# Altium PCB PCB_Main.PcbDoc
Units mil, origin at the board's own origin, x right, y up, seen from the top; angles counter-clockwise.
Board outline 2500 x 2500 mil, 4 copper layers (Top Layer, Layer 1, Layer 2, Bottom Layer), stack 62.449 mil thick; 116 components, 50 nets, 678 pads, 143 vias.
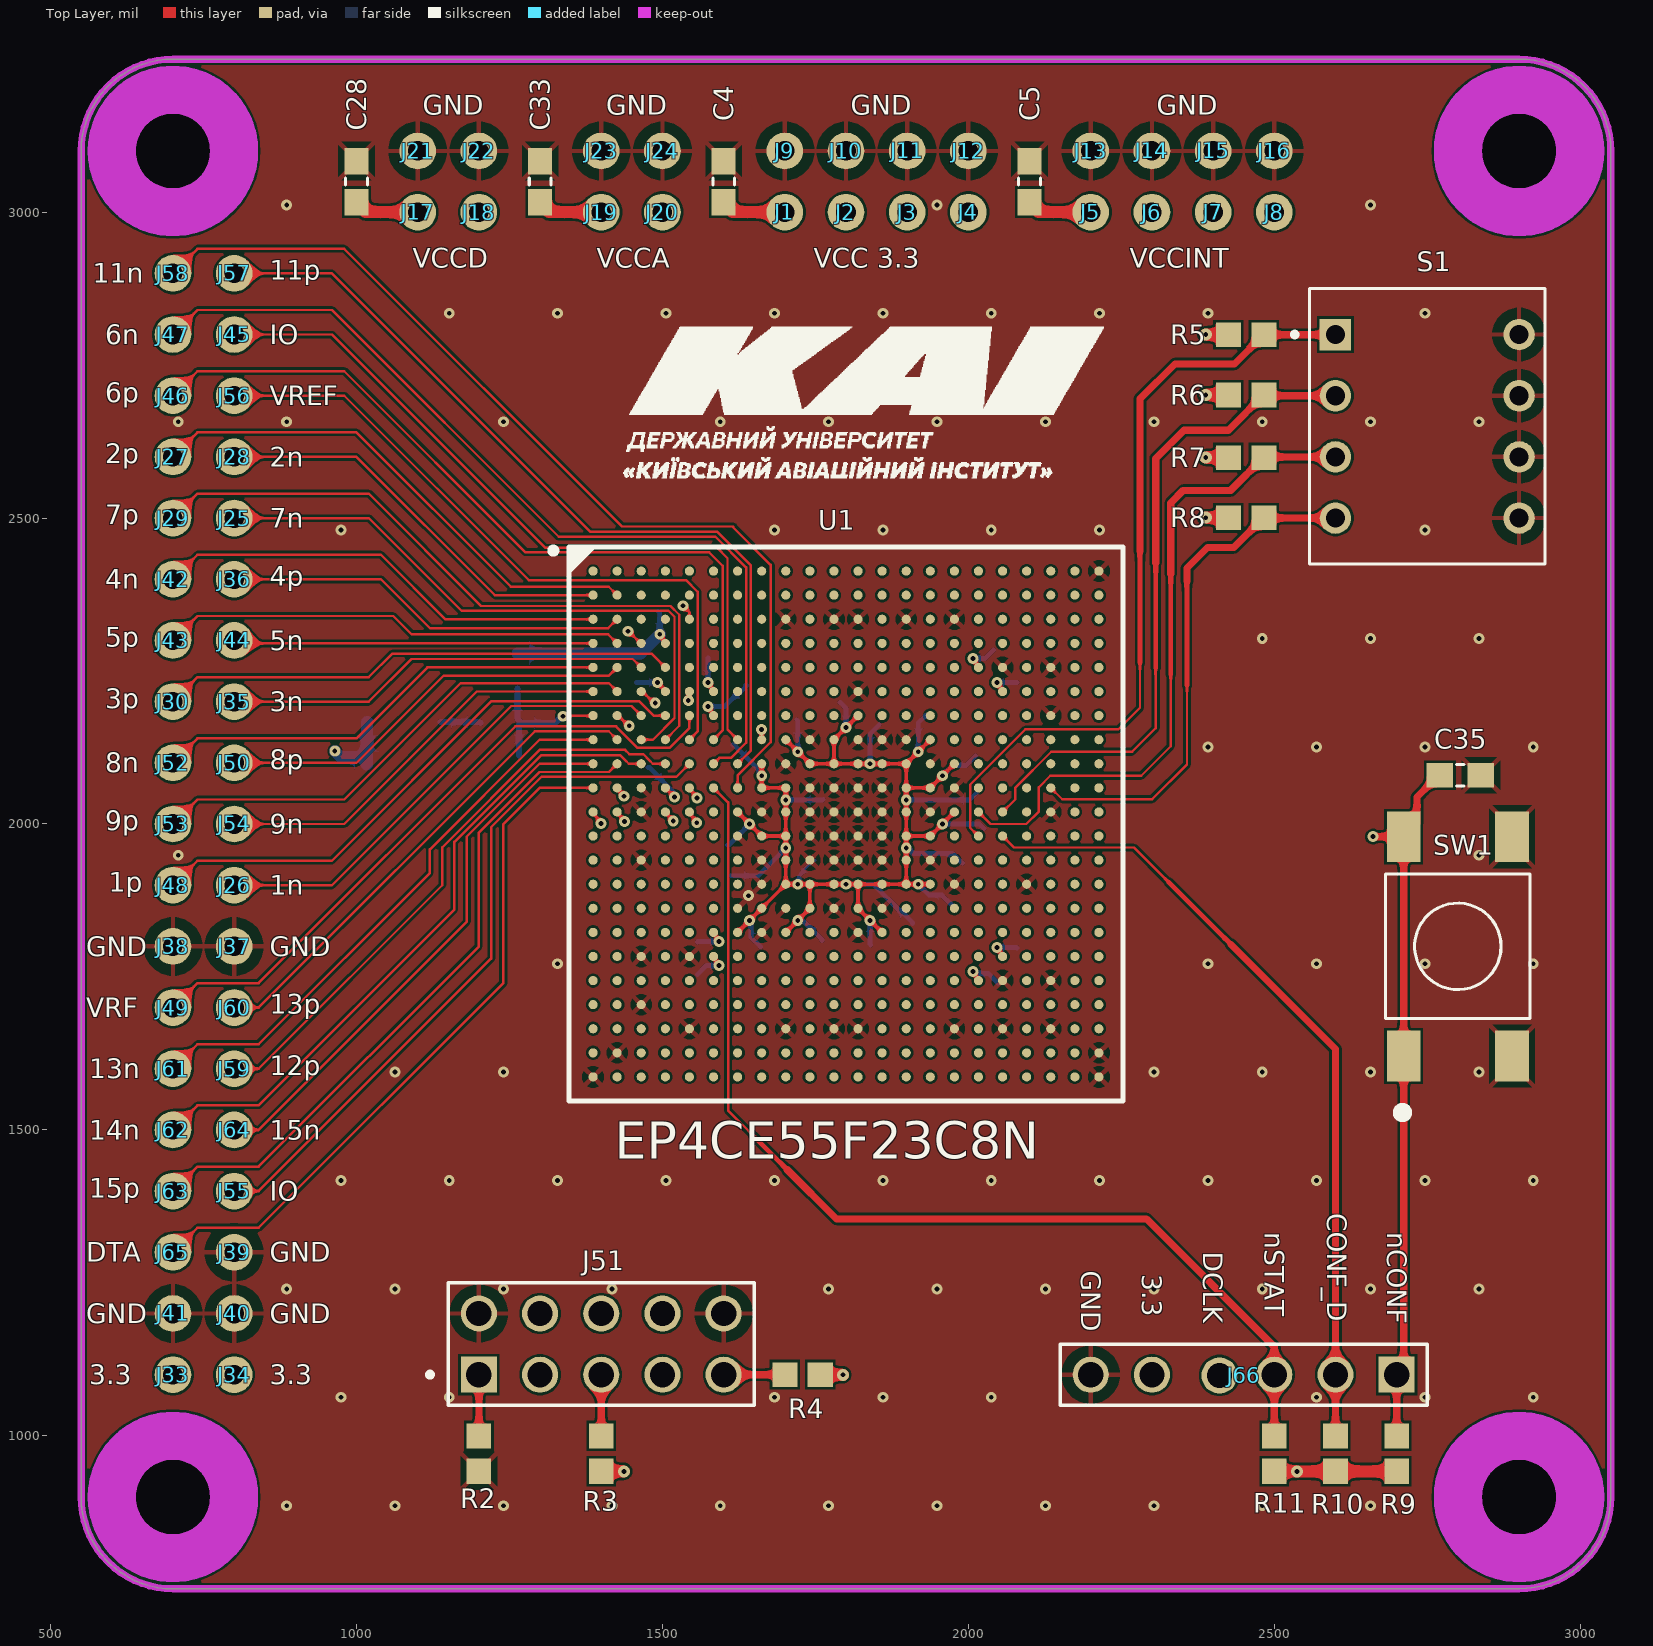
[diagram p0: Top Layer view]
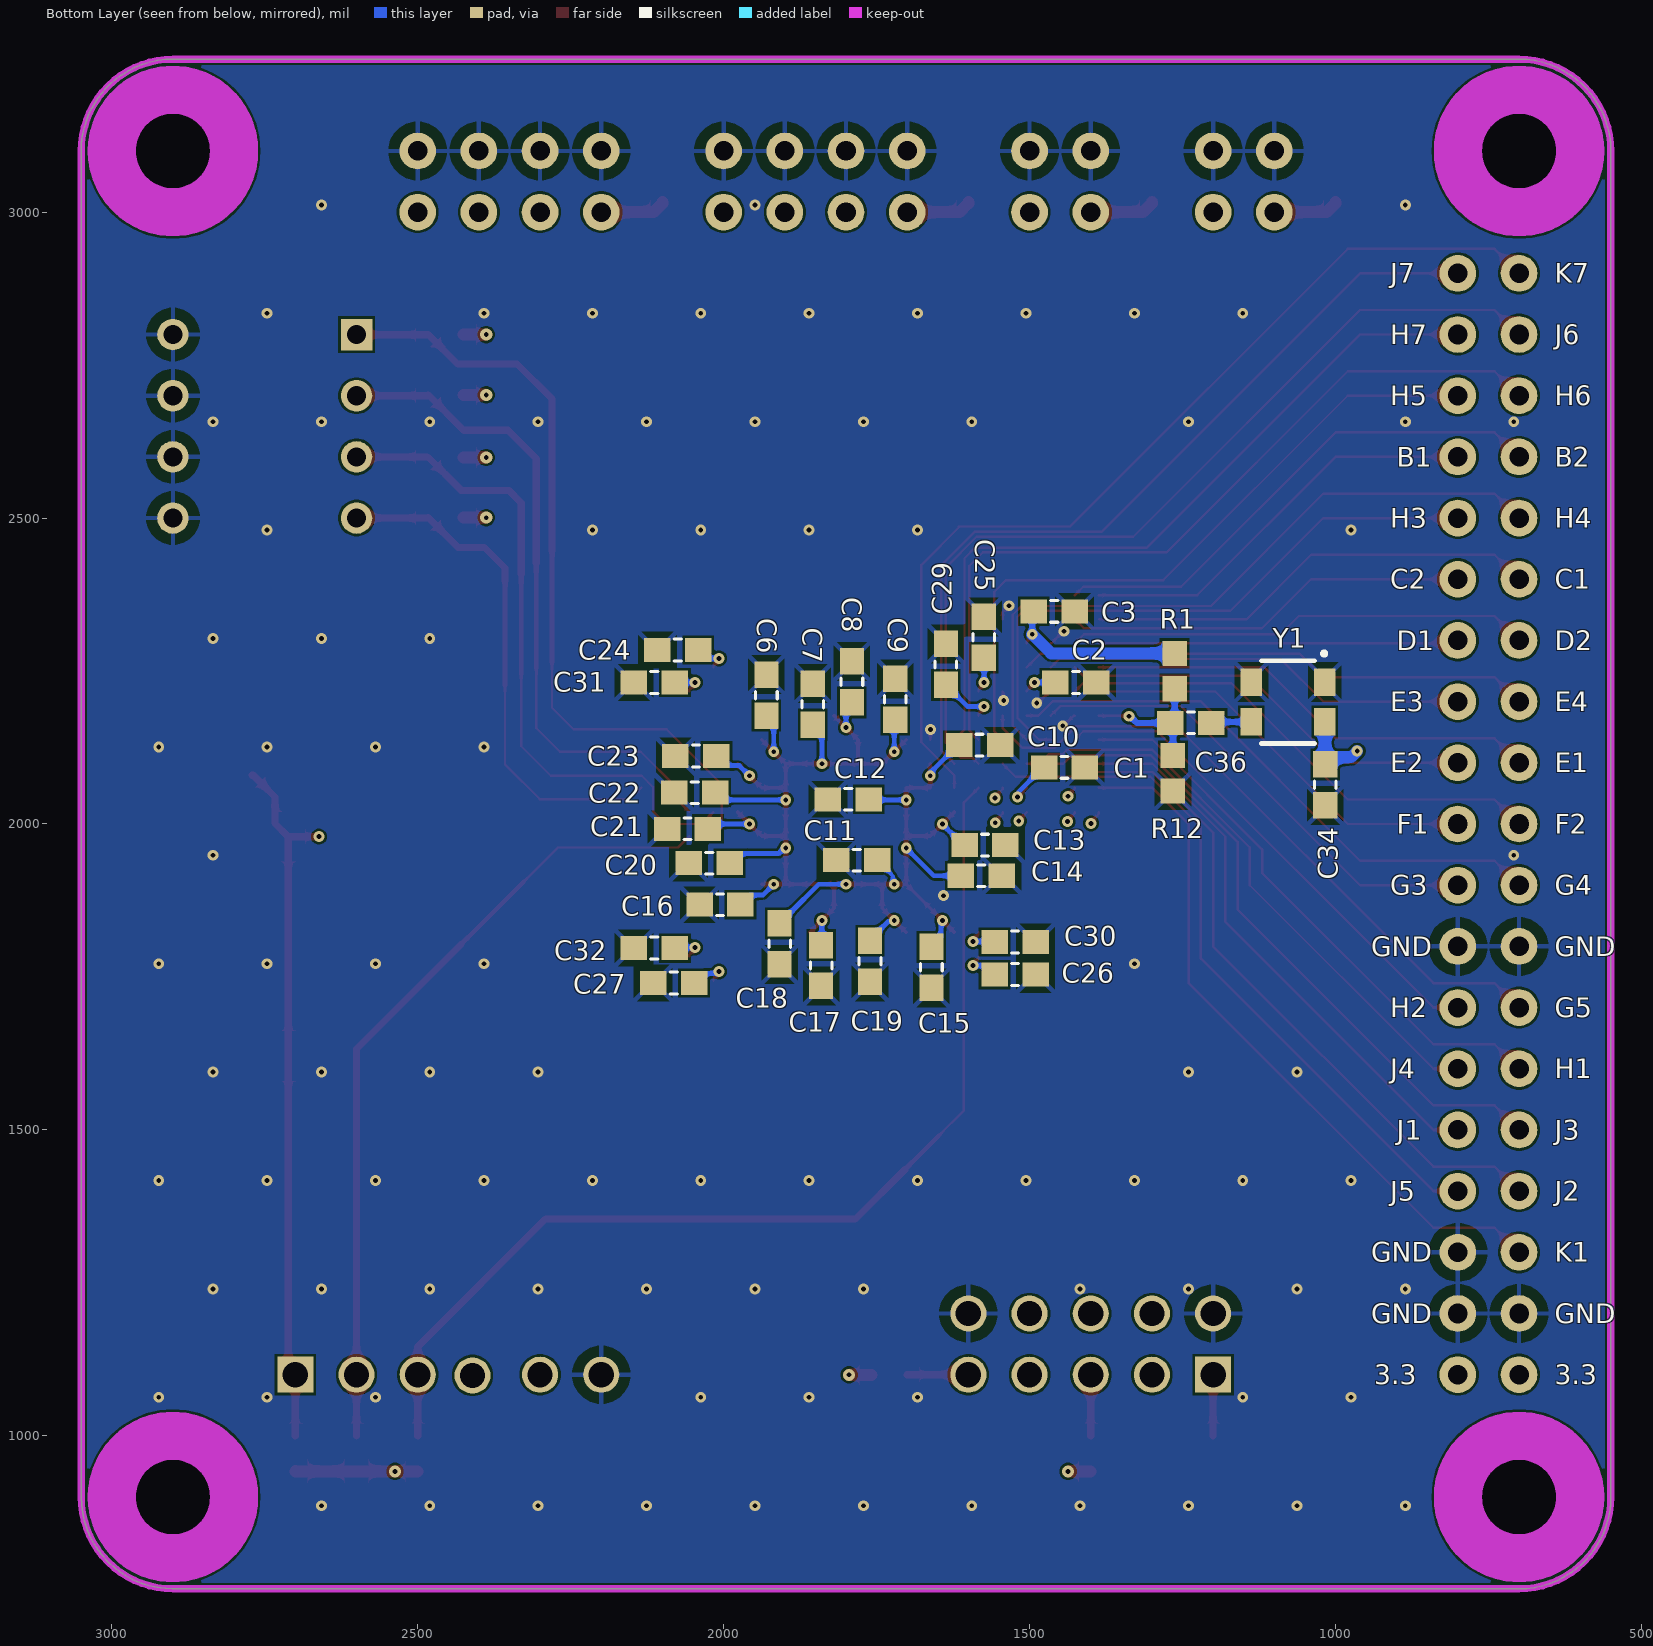
[diagram p1: Bottom Layer view, seen from below]
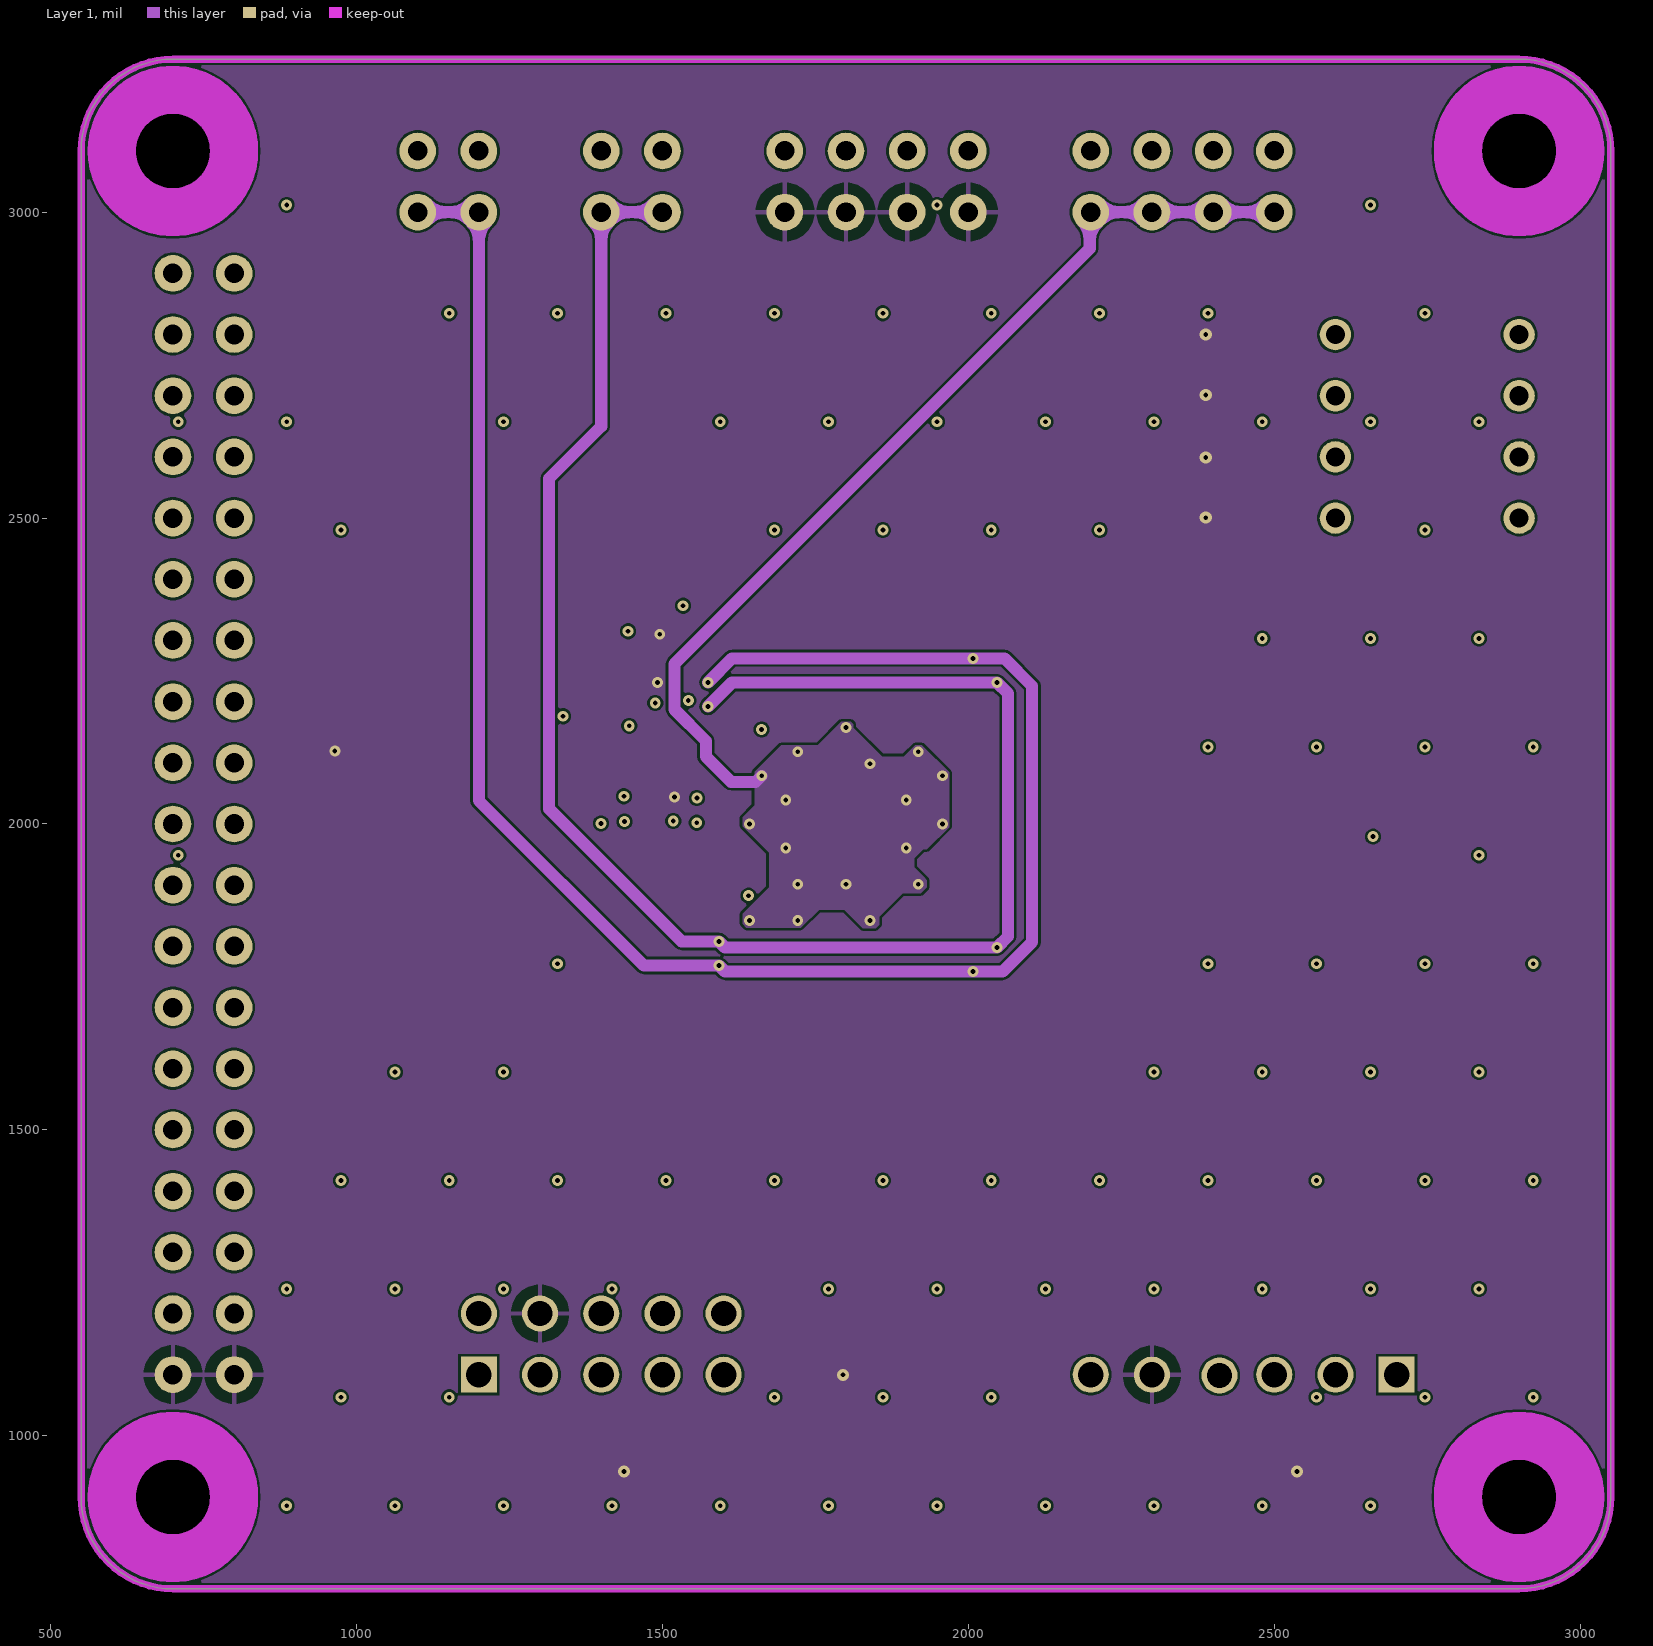
[diagram p2: Layer 1]
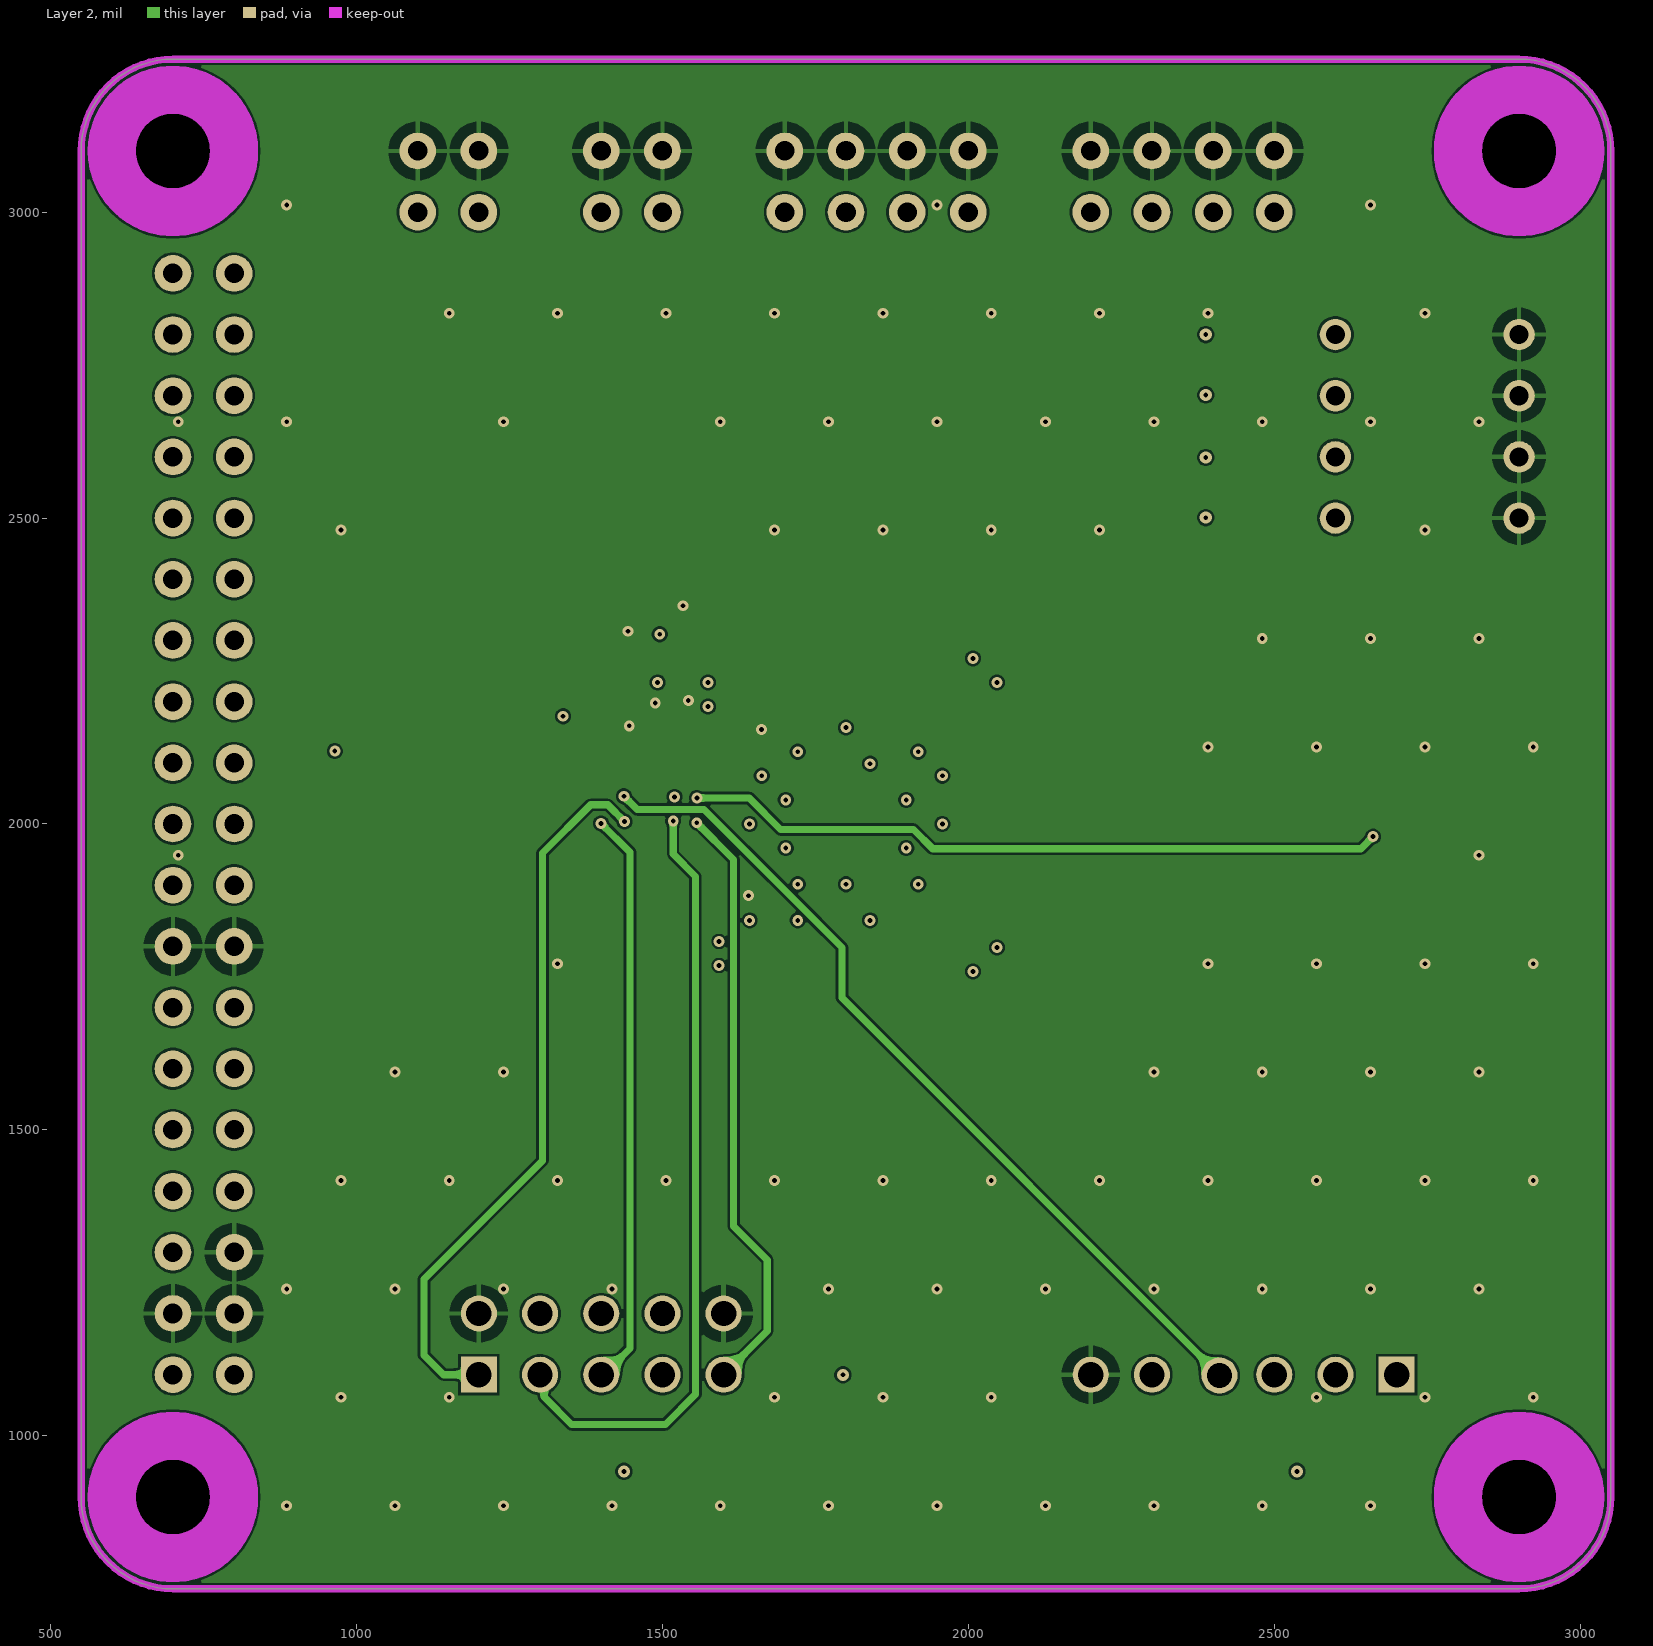
[diagram p3: Layer 2]
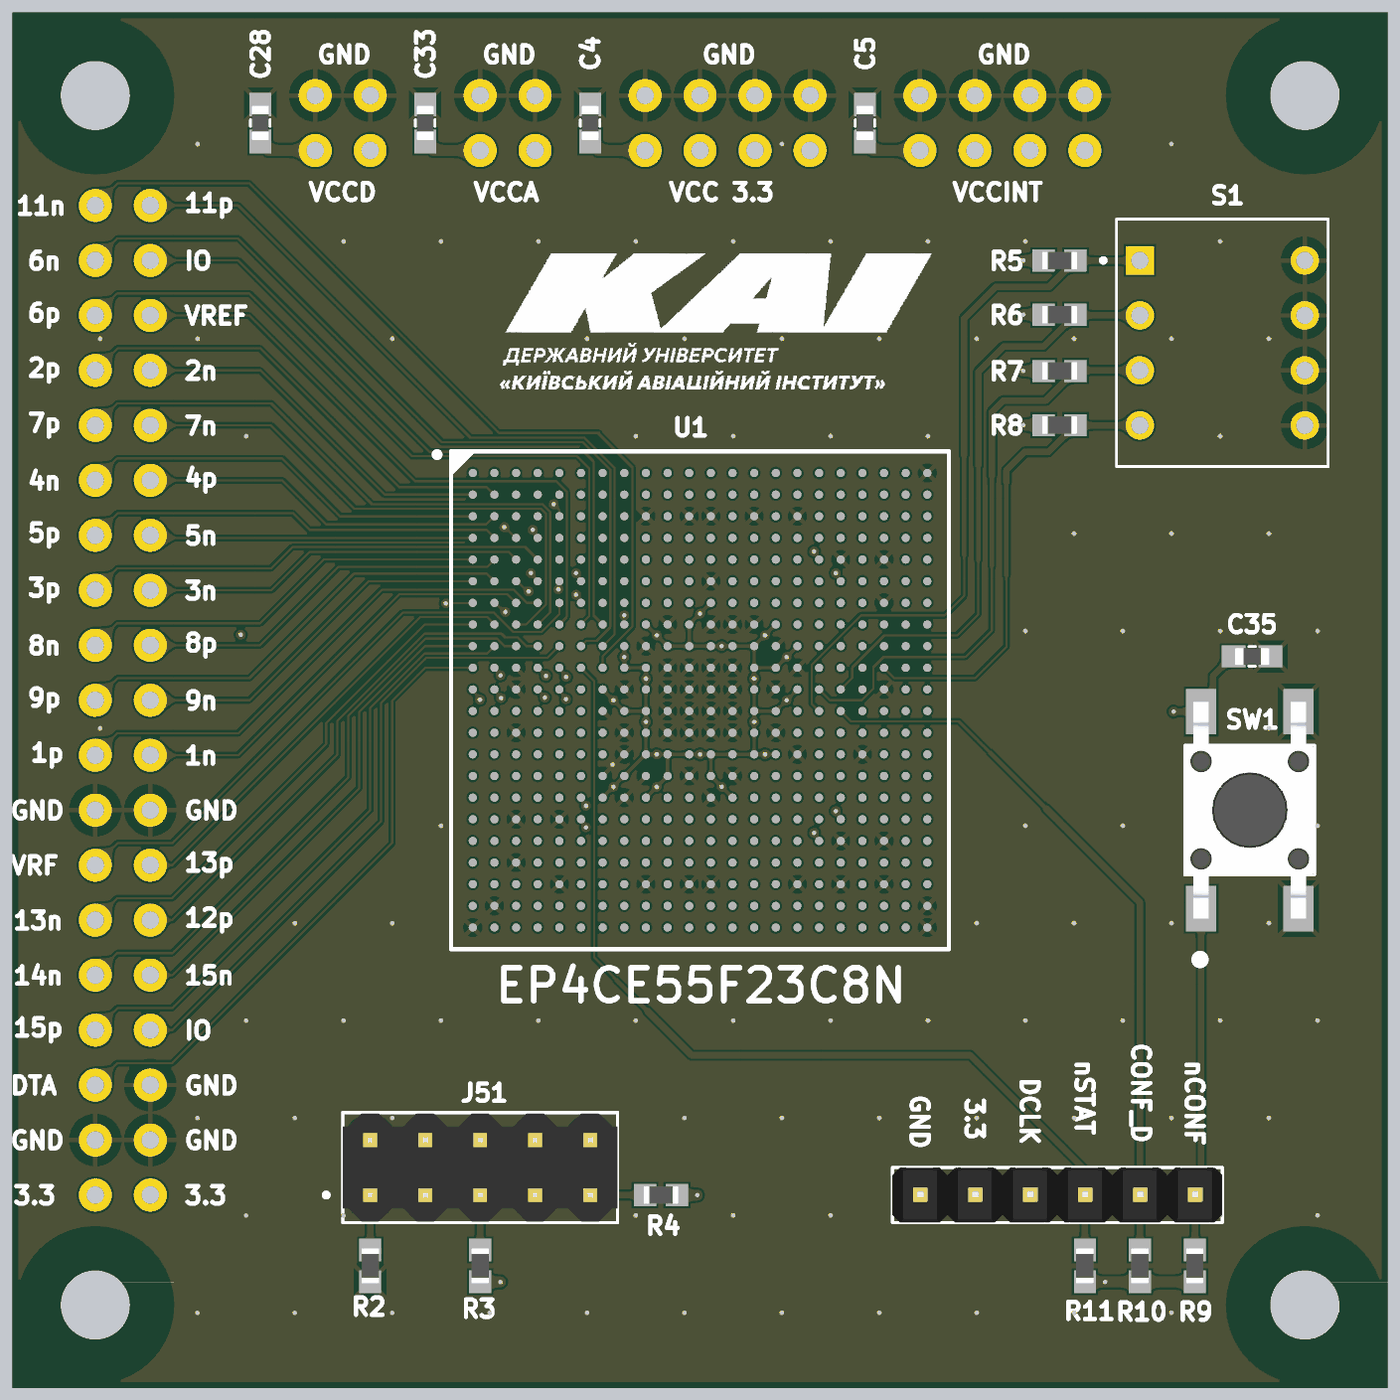
[diagram p4: 3D render of the assembled board from above, using the file's embedded part models]
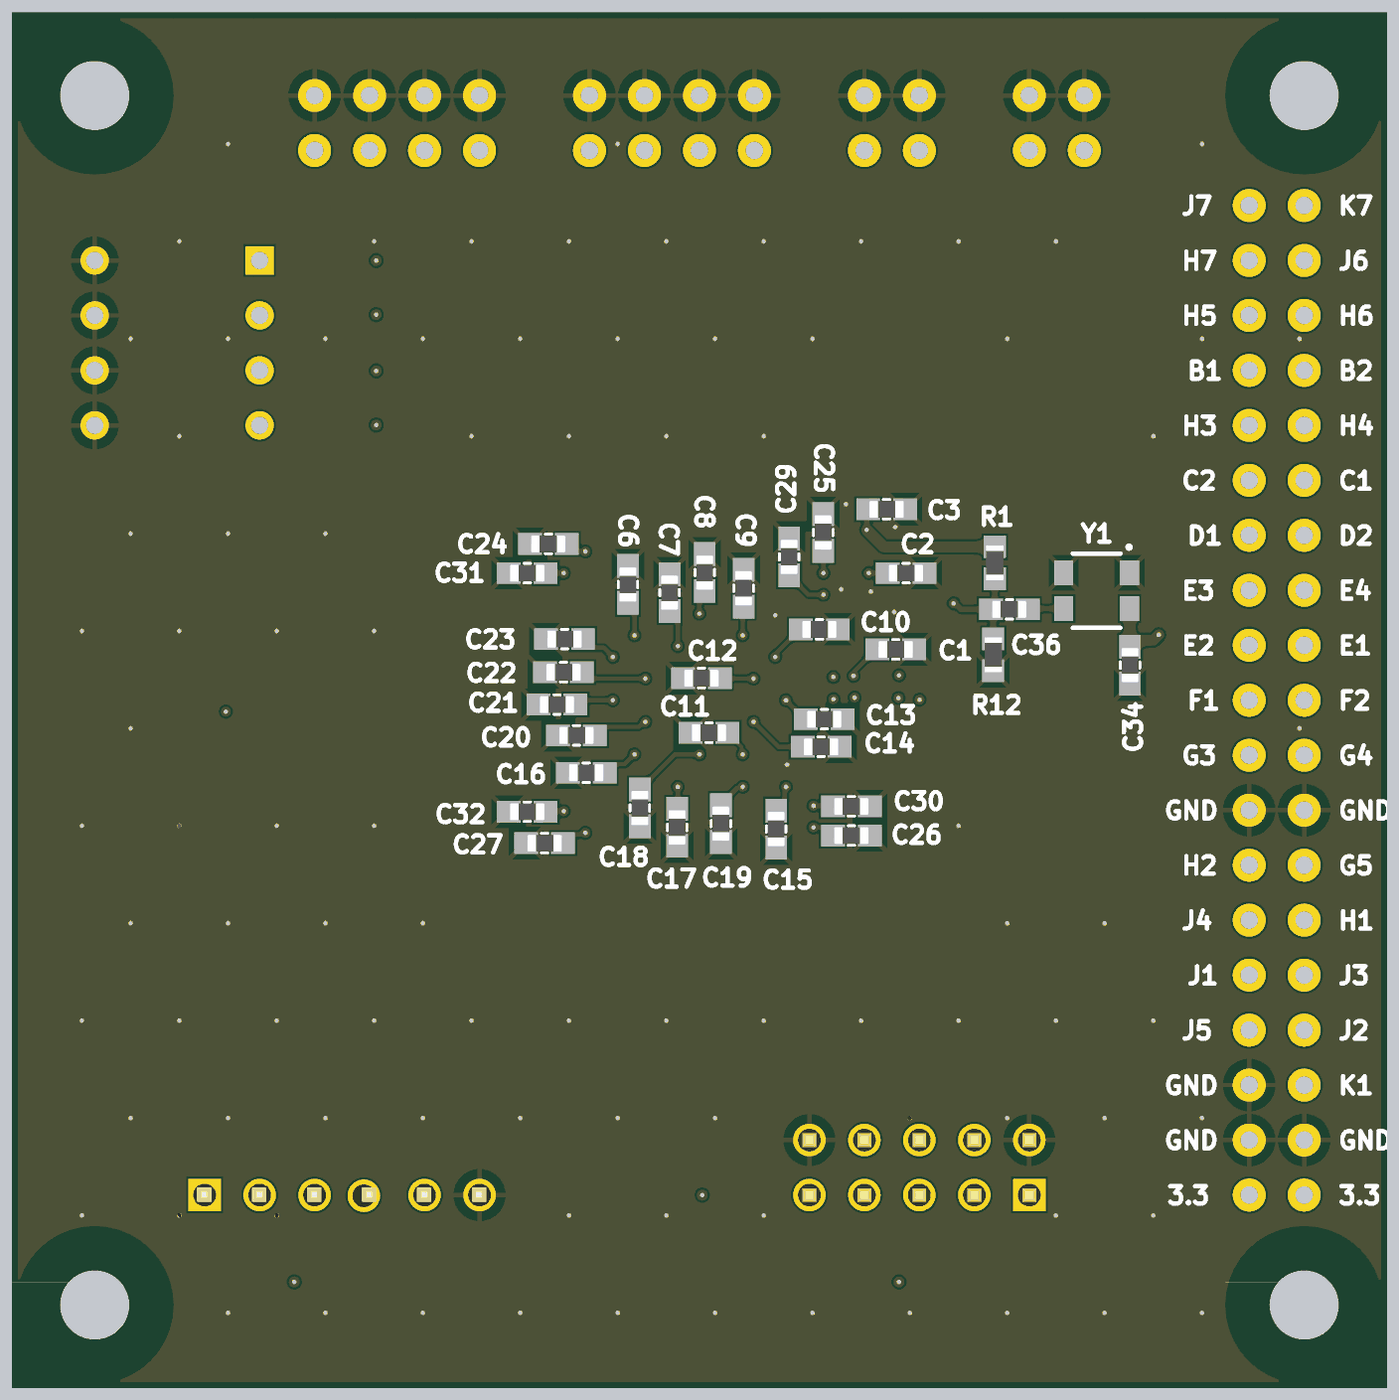
[diagram p5: 3D render of the assembled board from below, using the file's embedded part models]

## Layer stack, top to bottom
Top Solder: solder mask 0.4, Solder Resist, Dk 3.5
Top Layer: signal copper 1.378
Dielectric 2: prepreg 8.2835, PP-006, Dk 4.1
Layer 1: signal copper 0.5984
Dielectric 1: dielectric 41.9291, FR-4, Dk 4.8
Layer 2: signal copper 0.5984
Dielectric 3: prepreg 8.2835, PP-006, Dk 4.1
Bottom Layer: signal copper 1.378
Bottom Solder: solder mask 0.4, Solder Resist, Dk 3.5

## Board outline
700,750 cw(c700,900) 550,900 550,3100 cw(c700,3100) 700,3250 2900,3250 cw(c2900,3100) 3050,3100 3050,900 cw(c2900,900) 2900,750

## Design rules (kind name [scope] priority, off if disabled: settings)
Clearance "Stitching GND" [IsStitchingVia and InNet('GND') vs (IsVia and (Not IsStitchingVia)) Or IsPad] p1: gap=3.94 ignorepadtopadclearanceinfootprint=FALSE
Clearance [All] p2: gap=3.94 ignorepadtopadclearanceinfootprint=FALSE
HoleSize [All] p1: absolutevalues=TRUE maxlimit=196.85 minlimit=5.91 maxpercent=80.000 minpercent=20.000
HoleToHoleClearance [All] p1: gap=7.87 allowstackedmicrovias=TRUE
PlaneClearance [All] p1: clearance=19.68
PlaneConnect [All] p1: pad.planeconnectstyle=Relief pad.reliefexpansion=19.68 pad.reliefentries=4 pad.reliefconductorwidth=7.87 pad.reliefairgap=19.68 via.planeconnectstyle=Direct via.reliefexpansion=19.68 via.reliefentries=4 via.reliefconductorwidth=7.87 via.reliefairgap=19.68
PolygonConnect [All] p1: thpad.connectstyle=Relief thpad.reliefconductorwidth=7.87 thpad.reliefentries=4 thpad.polygonreliefangle="90 Angle" thpad.airgapwidth=17.72 smdpad.connectstyle=Relief smdpad.reliefconductorwidth=7.87 smdpad.reliefentries=4 smdpad.polygonreliefangle="45 Angle" smdpad.airgapwidth=9.84 via.connectstyle=Direct via.reliefconductorwidth=7.87 via.reliefentries=4 via.polygonreliefangle="90 Angle" via.airgapwidth=19.68
RoutingVias [All] p1: holewidth=7.87 width=17.72 viastyle="Through Hole" minholewidth=7.87 minwidth=17.72 maxholewidth=28 maxwidth=50
SilkToSolderMaskClearance [IsPad] p1: minsilkscreentomaskgap=1.97 clearancetoexposedcopper=TRUE
SolderMaskExpansion [All] p1: expansion=0 istentingtop=FALSE
SupplyNets "Schematic Supply Nets_4" [InNet('VCCINT')] p1: voltage=0.000
SupplyNets "Schematic Supply Nets_3" [InNet('VCCD')] p2: voltage=0.000
SupplyNets "Schematic Supply Nets_2" [InNet('GND')] p3: voltage=0.000
SupplyNets "Schematic Supply Nets_1" [InNet('VCC 3.3')] p4: voltage=0.000
SupplyNets "Schematic Supply Nets" [InNet('VCCA')] p5: voltage=0.000
Width [All] p1: maxlimit=78.74 minlimit=3.94 preferedwidth=7.87
25 further rules are at their usual default settings.

## Components (designator, comment, footprint, x,y, rotation, side; value= is the part's Value field where it differs from the comment)
C1 "100nF" CAPC1608X90 1442.91,2092.52 r0 bottom
C2 "100nF" CAPC1608X90 1424.21,2231.3 r0 bottom
C3 "100nF" CAPC1608X90 1459.65,2347.44 r0 bottom
C4 "1uF" CAPC1608X90 1600,3050 r270 top
C5 "1uF" CAPC1608X90 2100,3050 r270 top
C6 "100nF" CAPC1608X90 1930.12,2210.63 r270 bottom
C7 "100nF" CAPC1608X90 1854.33,2195.87 r270 bottom
C8 "100nF" CAPC1608X90 1790.35,2232.28 r270 bottom
C9 "100nF" CAPC1608X90 1719.49,2203.74 r270 bottom
C10 "100nF" CAPC1608X90 1581.69,2128.94 r0 bottom
C11 "100nF" CAPC1608X90 1782.48,1940.94 r180 bottom
C12 "100nF" CAPC1608X90 1796.26,2040.35 r180 bottom
C13 "100nF" CAPC1608X90 1572.83,1965.55 r0 bottom
C14 "100nF" CAPC1608X90 1578.74,1915.35 r0 bottom
C15 "100nF" CAPC1608X90 1660.43,1765.75 r90 bottom
C16 "100nF" CAPC1608X90 2005.91,1868.11 r180 bottom
C17 "100nF" CAPC1608X90 1840.55,1768.7 r90 bottom
C18 "100nF" CAPC1608X90 1908.46,1804.13 r90 bottom
C19 "100nF" CAPC1608X90 1760.83,1775.59 r90 bottom
C20 "100nF" CAPC1608X90 2023.62,1936.02 r180 bottom
C21 "100nF" CAPC1608X90 2059.06,1992.13 r180 bottom
C22 "100nF" CAPC1608X90 2047.24,2051.18 r180 bottom
C23 "100nF" CAPC1608X90 2045.28,2111.22 r180 bottom
C24 "100nF" CAPC1608X90 2074.8,2284.45 r180 bottom
C25 "100nF" CAPC1608X90 1574.8,2305.12 r270 bottom
C26 "100nF" CAPC1608X90 1523.62,1753.94 r0 bottom
C27 "100nF" CAPC1608X90 2081.69,1740.16 r180 bottom
C28 "1uF" CAPC1608X90 1000,3050 r270 top
C29 "100nF" CAPC1608X90 1636.81,2260.83 r270 bottom
C30 "100nF" CAPC1608X90 1523.62,1807.09 r0 bottom
C31 "100nF" CAPC1608X90 2113.19,2231.3 r180 bottom
C32 "100nF" CAPC1608X90 2113.19,1797.24 r180 bottom
C33 "1uF" CAPC1608X90 1300,3050 r270 top
C34 "100 nF 0603" CAPC1608X90 1016.73,2063.98 r90 bottom
C35 "100 nF 0603" CAPC1608X90 2804.13,2079.72 r0 top
C36 "1nF 0603" CAPC1608X90 1236.22,2165.35 r0 bottom
J1 "Pin1" Pin1 1700,3000 r0 top locked
J2 "Pin1" Pin1 1800,3000 r0 top locked
J3 "Pin1" Pin1 1900,3000 r0 top locked
J4 "Pin1" Pin1 2000,3000 r0 top locked
J5 "Pin1" Pin1 2200,3000 r0 top locked
J6 "Pin1" Pin1 2300,3000 r0 top locked
J7 "Pin1" Pin1 2400,3000 r0 top locked
J8 "Pin1" Pin1 2500,3000 r0 top locked
J9 "Pin1" Pin1 1700,3100 r0 top locked
J10 "Pin1" Pin1 1800,3100 r90 top locked
J11 "Pin1" Pin1 1900,3100 r0 top locked
J12 "Pin1" Pin1 2000,3100 r90 top locked
J13 "Pin1" Pin1 2200,3100 r90 top locked
J14 "Pin1" Pin1 2300,3100 r90 top locked
J15 "Pin1" Pin1 2400,3100 r90 top locked
J16 "Pin1" Pin1 2500,3100 r90 top locked
J17 "Pin1" Pin1 1100,3000 r90 top locked
J18 "Pin1" Pin1 1200,3000 r90 top locked
J19 "Pin1" Pin1 1400,3000 r90 top locked
J20 "Pin1" Pin1 1500,3000 r90 top locked
J21 "Pin1" Pin1 1100,3100 r0 top locked
J22 "Pin1" Pin1 1200,3100 r90 top locked
J23 "Pin1" Pin1 1400,3100 r90 top locked
J24 "Pin1" Pin1 1500,3100 r90 top locked
J25 "Pin1" Pin1 800,2500 r90 top
J26 "Pin1" Pin1 800,1900 r180 top
J27 "Pin1" Pin1 700,2600 r180 top
J28 "Pin1" Pin1 800,2600 r180 top
J29 "Pin1" Pin1 700,2500 r180 top
J30 "Pin1" Pin1 700,2200 r180 top
J33 "Pin1" Pin1 700,1100 r180 top
J34 "Pin1" Pin1 800,1100 r180 top
J35 "Pin1" Pin1 800,2200 r180 top
J36 "Pin1" Pin1 800,2400 r180 top
J37 "Pin1" Pin1 800,1800 r180 top
J38 "Pin1" Pin1 700,1800 r180 top
J39 "Pin1" Pin1 800,1300 r180 top
J40 "Pin1" Pin1 800,1200 r180 top
J41 "Pin1" Pin1 700,1200 r90 top
J42 "Pin1" Pin1 700,2400 r180 top
J43 "Pin1" Pin1 700,2300 r180 top
J44 "Pin1" Pin1 800,2300 r180 top
J45 "Pin1" Pin1 800,2800 r180 top
J46 "Pin1" Pin1 700,2700 r180 top
J47 "Pin1" Pin1 700,2800 r180 top
J48 "Pin1" Pin1 700,1900 r180 top
J49 "Pin1" Pin1 700,1700 r180 top
J50 "Pin1" Pin1 800,2100 r180 top
J51 "PLS 2 x 5" "PLS 2x5 2.54" 1200,1100 r90 top
J52 "Pin1" Pin1 700,2100 r180 top
J53 "Pin1" Pin1 700,2000 r180 top
J54 "Pin1" Pin1 800,2000 r180 top
J55 "Pin1" Pin1 800,1400 r180 top
J56 "Pin1" Pin1 800,2700 r180 top
J57 "Pin1" Pin1 800,2900 r180 top
J58 "Pin1" Pin1 700,2900 r90 top
J59 "Pin1" Pin1 800,1600 r180 top
J60 "Pin1" Pin1 800,1700 r180 top
J61 "Pin1" Pin1 700,1600 r90 top
J62 "Pin1" Pin1 700,1500 r180 top
J63 "Pin1" Pin1 700,1400 r180 top
J64 "Pin1" Pin1 800,1500 r180 top
J65 "Pin1" Pin1 700,1300 r180 top
J66 "PLS 1 x 6" "PLS 1x6 2.54" 2700,1100 r270 top locked
R1 "100 kOm 0603" "RES 0603" 1262.8,2250 r90 bottom
R2 "10kOm" "RES 0603" 1200,971.06 r90 top
R3 "10kOm" "RES 0603" 1400,971.06 r270 top
R4 "10kOm" "RES 0603" 1728.94,1100 r0 top
R5 "10kOm 0603" "RES 0603" 2453.94,2799.61 r180 top
R6 "10kOm 0603" "RES 0603" 2453.94,2701.18 r180 top
R7 "10kOm 0603" "RES 0603" 2453.94,2598.82 r180 top
R8 "10kOm 0603" "RES 0603" 2453.94,2500.39 r180 top
R9 "10kOm 0603" "RES 0603" 2700,971.06 r270 top
R10 "10kOm 0603" "RES 0603" 2600,971.06 r270 top
R11 "10kOm 0603" "RES 0603" 2500,971.06 r270 top
R12 "100 kOm 0603" "RES 0603" 1265.75,2082.68 r270 bottom
S1 "206-4" SW_206-4 2750,2650 r0 top
SW1 "" SW_5-1437565-0 2800,1800 r90 top locked
U1 "EP4CE55F23C8N" FBGA484_A-240 1800,2000 r0 top locked
Y1 "DSB321SDN" DSB321SDN 1077.57,2199.24 r0 bottom

## Footprints (in the part's own frame and the unit in brackets; to place one, negate y for a bottom-side part, rotate by r counter-clockwise, add the part's x,y. Pads: shape width x height; smd on the part's side, far side on the other; paste and mask are expansions set on the pad)
CAPC1608X90 [mm]
  rect 1.1x1 smd: 1(-0.85,0) 2(0.85,0)
  silkscreen extent -0.15,-0.45 0.15,0.45, body extent -0.8,-0.4 0.8,0.4, height 0.9
DSB321SDN [mil]
  rect 35x45 smd: 1(-60,-32.5) 2(60,-32.5) 3(60,32.5) 4(-60,32.5)
  silkscreen extent -62,-82 43,68
FBGA484_A-240 [mm] "BGA, 484-Leads, Body 23x23mm, Pitch 1mm"
  round 0.38 smd: A2(-9.5,10.5) A3(-8.5,10.5) A4(-7.5,10.5) A5(-6.5,10.5) A6(-5.5,10.5) A7(-4.5,10.5) A8(-3.5,10.5) A9(-2.5,10.5) A10(-1.5,10.5) A11(-0.5,10.5) A12(0.5,10.5) A13(1.5,10.5) A14(2.5,10.5) A15(3.5,10.5) A16(4.5,10.5) A17(5.5,10.5) A18(6.5,10.5) A19(7.5,10.5) A20(8.5,10.5) A21(9.5,10.5) A22(10.5,10.5) AA1(-10.5,-9.5) AA2(-9.5,-9.5) AA3(-8.5,-9.5) AA4(-7.5,-9.5) AA5(-6.5,-9.5) AA6(-5.5,-9.5) AA7(-4.5,-9.5) AA8(-3.5,-9.5) AA9(-2.5,-9.5) AA10(-1.5,-9.5) AA11(-0.5,-9.5) AA12(0.5,-9.5) AA13(1.5,-9.5) AA14(2.5,-9.5) AA15(3.5,-9.5) AA16(4.5,-9.5) AA17(5.5,-9.5) AA18(6.5,-9.5) AA19(7.5,-9.5) AA20(8.5,-9.5) AA21(9.5,-9.5) AA22(10.5,-9.5) AB1(-10.5,-10.5) AB2(-9.5,-10.5) AB3(-8.5,-10.5) AB4(-7.5,-10.5) AB5(-6.5,-10.5) AB6(-5.5,-10.5) AB7(-4.5,-10.5) AB8(-3.5,-10.5) AB9(-2.5,-10.5) AB10(-1.5,-10.5) AB11(-0.5,-10.5) AB12(0.5,-10.5) AB13(1.5,-10.5) AB14(2.5,-10.5) AB15(3.5,-10.5) AB16(4.5,-10.5) AB17(5.5,-10.5) AB18(6.5,-10.5) AB19(7.5,-10.5) AB20(8.5,-10.5) AB21(9.5,-10.5) AB22(10.5,-10.5) B1(-10.5,9.5) B2(-9.5,9.5) B3(-8.5,9.5) B4(-7.5,9.5) B5(-6.5,9.5) B6(-5.5,9.5) B7(-4.5,9.5) B8(-3.5,9.5) B9(-2.5,9.5) B10(-1.5,9.5) B11(-0.5,9.5) B12(0.5,9.5) B13(1.5,9.5) B14(2.5,9.5) B15(3.5,9.5) B16(4.5,9.5) B17(5.5,9.5) B18(6.5,9.5) B19(7.5,9.5) B20(8.5,9.5) B21(9.5,9.5) B22(10.5,9.5) C1(-10.5,8.5) C2(-9.5,8.5) C3(-8.5,8.5) C4(-7.5,8.5) C5(-6.5,8.5) C6(-5.5,8.5) C7(-4.5,8.5) C8(-3.5,8.5) C9(-2.5,8.5) C10(-1.5,8.5) C11(-0.5,8.5) C12(0.5,8.5) C13(1.5,8.5) C14(2.5,8.5) C15(3.5,8.5) C16(4.5,8.5) C17(5.5,8.5) C18(6.5,8.5) C19(7.5,8.5) C20(8.5,8.5) C21(9.5,8.5) C22(10.5,8.5) D1(-10.5,7.5) D2(-9.5,7.5) D3(-8.5,7.5) D4(-7.5,7.5) D5(-6.5,7.5) D6(-5.5,7.5) D7(-4.5,7.5) D8(-3.5,7.5) D9(-2.5,7.5) D10(-1.5,7.5) D11(-0.5,7.5) D12(0.5,7.5) D13(1.5,7.5) D14(2.5,7.5) D15(3.5,7.5) D16(4.5,7.5) D17(5.5,7.5) D18(6.5,7.5) D19(7.5,7.5) D20(8.5,7.5) D21(9.5,7.5) D22(10.5,7.5) E1(-10.5,6.5) E2(-9.5,6.5) E3(-8.5,6.5) E4(-7.5,6.5) E5(-6.5,6.5) E6(-5.5,6.5) E7(-4.5,6.5) E8(-3.5,6.5) E9(-2.5,6.5) E10(-1.5,6.5) E11(-0.5,6.5) E12(0.5,6.5) E13(1.5,6.5) E14(2.5,6.5) E15(3.5,6.5) E16(4.5,6.5) E17(5.5,6.5) E18(6.5,6.5) E19(7.5,6.5) E20(8.5,6.5) E21(9.5,6.5) E22(10.5,6.5) F1(-10.5,5.5) F2(-9.5,5.5) F3(-8.5,5.5) F4(-7.5,5.5) F5(-6.5,5.5) F6(-5.5,5.5) F7(-4.5,5.5) F8(-3.5,5.5) F9(-2.5,5.5) F10(-1.5,5.5) F11(-0.5,5.5) F12(0.5,5.5) F13(1.5,5.5) F14(2.5,5.5) F15(3.5,5.5) F16(4.5,5.5) F17(5.5,5.5) F18(6.5,5.5) F19(7.5,5.5) F20(8.5,5.5) F21(9.5,5.5) F22(10.5,5.5) G1(-10.5,4.5) G2(-9.5,4.5) G3(-8.5,4.5) G4(-7.5,4.5) G5(-6.5,4.5) G6(-5.5,4.5) G7(-4.5,4.5) G8(-3.5,4.5) G9(-2.5,4.5) G10(-1.5,4.5) G11(-0.5,4.5) G12(0.5,4.5) G13(1.5,4.5) G14(2.5,4.5) G15(3.5,4.5) G16(4.5,4.5) G17(5.5,4.5) G18(6.5,4.5) G19(7.5,4.5) G20(8.5,4.5) G21(9.5,4.5) G22(10.5,4.5) H1(-10.5,3.5) H2(-9.5,3.5) H3(-8.5,3.5) H4(-7.5,3.5) H5(-6.5,3.5) H6(-5.5,3.5) H7(-4.5,3.5) H8(-3.5,3.5) H9(-2.5,3.5) H10(-1.5,3.5) H11(-0.5,3.5) H12(0.5,3.5) H13(1.5,3.5) H14(2.5,3.5) H15(3.5,3.5) H16(4.5,3.5) H17(5.5,3.5) H18(6.5,3.5) H19(7.5,3.5) H20(8.5,3.5) H21(9.5,3.5) H22(10.5,3.5) J1(-10.5,2.5) J2(-9.5,2.5) J3(-8.5,2.5) J4(-7.5,2.5) J5(-6.5,2.5) J6(-5.5,2.5) J7(-4.5,2.5) J8(-3.5,2.5) J9(-2.5,2.5) J10(-1.5,2.5) J11(-0.5,2.5) J12(0.5,2.5) J13(1.5,2.5) J14(2.5,2.5) J15(3.5,2.5) J16(4.5,2.5) J17(5.5,2.5) J18(6.5,2.5) J19(7.5,2.5) J20(8.5,2.5) J21(9.5,2.5) J22(10.5,2.5) K1(-10.5,1.5) K2(-9.5,1.5) K3(-8.5,1.5) K4(-7.5,1.5) K5(-6.5,1.5) K6(-5.5,1.5) K7(-4.5,1.5) K8(-3.5,1.5) K9(-2.5,1.5) K10(-1.5,1.5) K11(-0.5,1.5) K12(0.5,1.5) K13(1.5,1.5) K14(2.5,1.5) K15(3.5,1.5) K16(4.5,1.5) K17(5.5,1.5) K18(6.5,1.5) K19(7.5,1.5) K20(8.5,1.5) K21(9.5,1.5) K22(10.5,1.5) L1(-10.5,0.5) L2(-9.5,0.5) L3(-8.5,0.5) L4(-7.5,0.5) L5(-6.5,0.5) L6(-5.5,0.5) L7(-4.5,0.5) L8(-3.5,0.5) L9(-2.5,0.5) L10(-1.5,0.5) L11(-0.5,0.5) L12(0.5,0.5) L13(1.5,0.5) L14(2.5,0.5) L15(3.5,0.5) L16(4.5,0.5) L17(5.5,0.5) L18(6.5,0.5) L19(7.5,0.5) L20(8.5,0.5) L21(9.5,0.5) L22(10.5,0.5) M1(-10.5,-0.5) M2(-9.5,-0.5) M3(-8.5,-0.5) M4(-7.5,-0.5) M5(-6.5,-0.5) M6(-5.5,-0.5) M7(-4.5,-0.5) M8(-3.5,-0.5) M9(-2.5,-0.5) M10(-1.5,-0.5) M11(-0.5,-0.5) M12(0.5,-0.5) M13(1.5,-0.5) M14(2.5,-0.5) M15(3.5,-0.5) M16(4.5,-0.5) M17(5.5,-0.5) M18(6.5,-0.5) M19(7.5,-0.5) M20(8.5,-0.5) M21(9.5,-0.5) M22(10.5,-0.5) N1(-10.5,-1.5) N2(-9.5,-1.5) N3(-8.5,-1.5) N4(-7.5,-1.5) N5(-6.5,-1.5) N6(-5.5,-1.5) N7(-4.5,-1.5) N8(-3.5,-1.5) N9(-2.5,-1.5) N10(-1.5,-1.5) N11(-0.5,-1.5) N12(0.5,-1.5) N13(1.5,-1.5) N14(2.5,-1.5) N15(3.5,-1.5) N16(4.5,-1.5) N17(5.5,-1.5) N18(6.5,-1.5) N19(7.5,-1.5) N20(8.5,-1.5) N21(9.5,-1.5) N22(10.5,-1.5) P1(-10.5,-2.5) P2(-9.5,-2.5) P3(-8.5,-2.5) P4(-7.5,-2.5) P5(-6.5,-2.5) P6(-5.5,-2.5) P7(-4.5,-2.5) P8(-3.5,-2.5) P9(-2.5,-2.5) P10(-1.5,-2.5) P11(-0.5,-2.5) P12(0.5,-2.5) P13(1.5,-2.5) P14(2.5,-2.5) P15(3.5,-2.5) P16(4.5,-2.5) P17(5.5,-2.5) P18(6.5,-2.5) P19(7.5,-2.5) P20(8.5,-2.5) P21(9.5,-2.5) P22(10.5,-2.5) R1(-10.5,-3.5) R2(-9.5,-3.5) R3(-8.5,-3.5) R4(-7.5,-3.5) R5(-6.5,-3.5) R6(-5.5,-3.5) R7(-4.5,-3.5) R8(-3.5,-3.5) R9(-2.5,-3.5) R10(-1.5,-3.5) R11(-0.5,-3.5) R12(0.5,-3.5) R13(1.5,-3.5) R14(2.5,-3.5) R15(3.5,-3.5) R16(4.5,-3.5) R17(5.5,-3.5) R18(6.5,-3.5) R19(7.5,-3.5) R20(8.5,-3.5) R21(9.5,-3.5) R22(10.5,-3.5) T1(-10.5,-4.5) T2(-9.5,-4.5) T3(-8.5,-4.5) T4(-7.5,-4.5) T5(-6.5,-4.5) T6(-5.5,-4.5) T7(-4.5,-4.5) T8(-3.5,-4.5) T9(-2.5,-4.5) T10(-1.5,-4.5) T11(-0.5,-4.5) T12(0.5,-4.5) T13(1.5,-4.5) T14(2.5,-4.5) T15(3.5,-4.5) T16(4.5,-4.5) T17(5.5,-4.5) T18(6.5,-4.5) T19(7.5,-4.5) T20(8.5,-4.5) T21(9.5,-4.5) T22(10.5,-4.5) U1(-10.5,-5.5) U2(-9.5,-5.5) U3(-8.5,-5.5) U4(-7.5,-5.5) U5(-6.5,-5.5) U6(-5.5,-5.5) U7(-4.5,-5.5) U8(-3.5,-5.5) U9(-2.5,-5.5) U10(-1.5,-5.5) U11(-0.5,-5.5) U12(0.5,-5.5) U13(1.5,-5.5) U14(2.5,-5.5) U15(3.5,-5.5) U16(4.5,-5.5) U17(5.5,-5.5) U18(6.5,-5.5) U19(7.5,-5.5) U20(8.5,-5.5) U21(9.5,-5.5) U22(10.5,-5.5) V1(-10.5,-6.5) V2(-9.5,-6.5) V3(-8.5,-6.5) V4(-7.5,-6.5) V5(-6.5,-6.5) V6(-5.5,-6.5) V7(-4.5,-6.5) V8(-3.5,-6.5) V9(-2.5,-6.5) V10(-1.5,-6.5) V11(-0.5,-6.5) V12(0.5,-6.5) V13(1.5,-6.5) V14(2.5,-6.5) V15(3.5,-6.5) V16(4.5,-6.5) V17(5.5,-6.5) V18(6.5,-6.5) V19(7.5,-6.5) V20(8.5,-6.5) V21(9.5,-6.5) V22(10.5,-6.5) W1(-10.5,-7.5) W2(-9.5,-7.5) W3(-8.5,-7.5) W4(-7.5,-7.5) W5(-6.5,-7.5) W6(-5.5,-7.5) W7(-4.5,-7.5) W8(-3.5,-7.5) W9(-2.5,-7.5) W10(-1.5,-7.5) W11(-0.5,-7.5) W12(0.5,-7.5) W13(1.5,-7.5) W14(2.5,-7.5) W15(3.5,-7.5) W16(4.5,-7.5) W17(5.5,-7.5) W18(6.5,-7.5) W19(7.5,-7.5) W20(8.5,-7.5) W21(9.5,-7.5) W22(10.5,-7.5) Y1(-10.5,-8.5) Y2(-9.5,-8.5) Y3(-8.5,-8.5) Y4(-7.5,-8.5) Y5(-6.5,-8.5) Y6(-5.5,-8.5) Y7(-4.5,-8.5) Y8(-3.5,-8.5) Y9(-2.5,-8.5) Y10(-1.5,-8.5) Y11(-0.5,-8.5) Y12(0.5,-8.5) Y13(1.5,-8.5) Y14(2.5,-8.5) Y15(3.5,-8.5) Y16(4.5,-8.5) Y17(5.5,-8.5) Y18(6.5,-8.5) Y19(7.5,-8.5) Y20(8.5,-8.5) Y21(9.5,-8.5) Y22(10.5,-8.5) ""(-10.5,10.5)
  silkscreen extent -12.27,-11.5 11.5,11.5, body extent -11.5,-11.5 11.5,11.5, height 2.4
Pin1 [mil]
  round 60 hole 32: 1(0,0)
"PLS 1x6 2.54" [mm]
  rect 1.5x1.5 hole 1.05: 1(0,0)
  round 1.5 hole 1.05: 2(0,-2.54) 3(0,-5.08) 4(0.033,-7.354) 5(0,-10.16) 6(0,-12.7)
  silkscreen extent -1.27,-13.97 1.27,1.27, body extent -1.27,-13.97 1.27,1.27, height 9.2
"PLS 2x5 2.54" [mm]
  rect 1.5x1.5 hole 1.05: 1(0,0)
  round 1.5 hole 1.05: 2(2.54,0) 3(0,-2.54) 4(2.54,-2.54) 5(0,-5.08) 6(2.54,-5.08) 7(0,-7.62) 8(2.54,-7.62) 9(0,-10.16) 10(2.54,-10.16)
  silkscreen extent -1.27,-11.43 3.81,1.27, body extent -1.23,-11.43 3.77,1.27, height 8.4
"RES 0603" [mm]
  rect 1.04x1.02 smd: 1(-0.735,0) 2(0.735,0)
  body extent -0.8,-0.4 0.8,0.4, height 0.55
SW_5-1437565-0 [mm]
  rect 2.1x1.4 smd: 1(-4.55,2.25) 1(4.55,2.25) 2(-4.55,-2.25) 2(4.55,-2.25)
  silkscreen extent -7.1,-3 3,3, body extent -5,-3 5,3, height 7.26
SW_206-4 [mm]
  rect 1.308x1.308 / inner round 1.308 / far side rect 1.308x1.308 hole 0.8: 1(-3.81,3.81)
  round 1.308 hole 0.8: 2(-3.81,1.27) 3(-3.81,-1.27) 4(-3.81,-3.81) 5(3.81,-3.81) 6(3.81,-1.27) 7(3.81,1.27) 8(3.81,3.81)
  silkscreen extent -5.6,-5.71 4.89,5.71, body extent -4.95,-5.81 4.95,5.81, height 6.8

## Part data
C1 C2 C3 C6 C7 C8 C9 C10 C11 C12 C13 C14 C15 C16 C17 C18 C19 C20 C21 C22 C23 C24 C25 C26 C27 C29 C30 C31 C32: library part "100 nF 0603"
C4 C5 C28 C33: library part "1uF 0603"
R2 R3 R4: library part "10kOm 0603"
S1: Package=None, Availability=Unavailable, MF="{'manufacturer': u'CTS Components'}", MP=206-4, Price=None
SW1: library part 5-1437565-0, "Alcoswitch, Tactile switch,SMT,SPST,raised actuator", Package=None, Check_prices=https://www.snapeda.com/parts/FSM6JSMATR/TE+Connectivity+ALCOSWITCH+Switches/view-part/?ref=eda, MF="TE Connectivity", MP=FSM6JSMATR, SnapEDA_Link=https://www.snapeda.com/parts/FSM6JSMATR/TE+Connectivity+ALCOSWITCH+Switches/view-part/?ref=snap
U1: library part CMP-0038-00161-1, "Cyclone IV Family FPGA, 1.2V Core, 324 I/O Pins, 4 PLLs, 484-Pin FBGA, Speed Grade 8, Commercial Grade, Pb-Free", Manufacturer=Altera, Code_JEDEC=MS-034-AAJ-1, ComponentLink1Description="Manufacturer URL", ComponentLink1URL=http://www.altera.com/, ComponentLink2Description=Handbook, ComponentLink2URL=http://www.altera.com/literature/hb/cyclone-iv/cyclone4-handbook.pdf, ComponentLink3Description=Pinout, ComponentLink3URL=http://www.altera.com/literature/lit-dp.jsp?category=cyc%204&showspreadsheet=y, ComponentLink4Description="Package Specification", ComponentLink4URL=http://www.altera.com/devicepackaging/04R00247-02.pdf, DatasheetVersion="ver1.6, Nov-2011", PackageDescription="484-Pin FineLine Ball Grid Array (FBGA) - Wire Bond - A:2.40", PackageReference=FBGA484_A-240, PackageVersion="ver1.0, Jun-2011"

## Free pads (board coordinates)
  round 0 hole 125.98 unplated: 6(700,900) 6(700,3100) 6(2900,900) 6(2900,3100)

## Via types
v1: diameter 17.72/17.72/17.72/17.72 (per signal layer), hole 7.87, Top Layer to Bottom Layer, tented both sides, 91 vias
v2: diameter 17.72, hole 7.87, Top Layer to Bottom Layer, tented both sides, 45 vias
v3: diameter 19.68, hole 7.87, Top Layer to Bottom Layer, tented both sides, 7 vias

## Nets (pads, with @x,y where several pads share a name; then routed paths per layer and width w, separated by ;. In a path a pad name is that pad's centre, name@x,y a point inside that pad or via, vN(x,y) a via of type N, cw(c..) or ccw(c..) an arc to the next point about the centre after c; other vN are vias at no path point)
CLK1: C36.2 R1.1 R12.1 U1.G1 | length 235.8
  Top Layer w3.94: v2(1337.6,2176.18) 1338.09,2176.67 1386.12,2176.67 U1.G1
  Bottom Layer w9.84: R1.1 1262.8,2172.24 C36.2 ; R12.1 1265.75,2161.42 C36.2 ; v2(1337.6,2176.18) 1335.47,2176.18 1324.64,2165.35 C36.2
CONF_D: J66.2 R10.1 U1.M18 | length 1320.5
  Top Layer w3.94: U1.M18 2074.61,1961.61 2270.67,1961.61 2327.76,1904.53
  Top Layer w7.87: 2327.76,1904.53 2429.13,1803.15
  Top Layer w11.81: 2429.13,1803.15 2600,1632.28 J66.2 R10.1
DCLK: J66.4 U1.K2 | length 1432.1
  Top Layer w3.94: U1.K2 1425.98,2057.68 1437.01,2046.65 v2(1437.01,2045.28)
  Layer 2 w11.81: v2(1437.01,2045.28) 1458.66,2023.62 1567.91,2023.62 1793.31,1798.23 1793.31,1715.86 J66.4
GND: C1.1 C2.1 C3.1 C4.1 C5.1 C6.1 C7.1 C8.1 C9.1 C10.1 C11.1 C12.1 C13.1 C14.1 C15.1 C16.1 C17.1 C18.1 C19.1 C20.1 C21.1 C22.1 C23.1 C24.1 C25.1 C26.1 C27.1 C28.1 C29.1 C30.1 C31.1 C32.1 C33.1 C34.1 C35.2 J9.1 J10.1 J11.1 J12.1 J13.1 J14.1 J15.1 J16.1 J21.1 J22.1 J23.1 J24.1 J37.1 J38.1 J39.1 J40.1 J41.1 J51.2 J51.10 J66.6 R2.1 R12.2 S1.5 S1.6 S1.7 S1.8 SW1.2 U1.A22 U1.AA2 U1.AA22 U1.AB1 U1.AB22 U1.C5 U1.C9 U1.C11 U1.C12 U1.C14 U1.C16 U1.D3 U1.E18 U1.E20 U1.F3 U1.F5 U1.F12 U1.G2 U1.G20 U1.H8 U1.H10 U1.H12 U1.H13 U1.H14 U1.J9 U1.J15 U1.K3 U1.K10 U1.K11 U1.K12 U1.K13 U1.K16 U1.L3 U1.L8 U1.L10 U1.L11 U1.L12 U1.L13 U1.L15 U1.L20 U1.M7 U1.M10 U1.M11 U1.M12 U1.M13 U1.N3 U1.N8 U1.N10 U1.N11 U1.N12 U1.N13 U1.N15 U1.P8 U1.P16 U1.P19 U1.R7 U1.R9 U1.R11 U1.R13 U1.T8 U1.T12 U1.U3 U1.U5 U1.V18 U1.V20 U1.W3 U1.Y5 U1.Y9 U1.Y11 U1.Y12 U1.Y16 U1.Y18 U1.Y20 Y1.1 Y1.2 | length 145.4
  Top Layer w3.94: U1.G2 1427.56,2177.17 1444.29,2160.43 v2(1445.87,2160.43) ; v2(1443.9,2314.96) 1444.78,2314.96 1464.47,2295.28 U1.D3 ; U1.F3 1467.42,2216.54 1486.12,2197.83 v2(1488.19,2197.83) ; v2(1533.72,2356.6) 1544.09,2346.22 U1.C5 ; v2(1542.32,2201.77) 1543.21,2202.66 1543.21,2215.65 U1.F5 ; v2(1662.1,2154.43) 1662.1,2137.9 U1.H8
  other v1: 885.83,885.83 1062.99,885.83 1240.16,885.83 1417.32,885.83 1594.49,885.83 1771.65,885.83 1948.82,885.83 2125.98,885.83 2303.15,885.83 2480.32,885.83 2657.48,885.83 974.41,1062.99 1151.58,1062.99 1683.07,1062.99 1860.24,1062.99 2037.4,1062.99 2568.9,1062.99 2746.06,1062.99 2923.23,1062.99 885.83,1240.16 1062.99,1240.16 1240.16,1240.16 1417.32,1240.16 1771.65,1240.16 1948.82,1240.16 2125.98,1240.16 2303.15,1240.16 2480.32,1240.16 2657.48,1240.16 2834.65,1240.16 974.41,1417.32 1151.58,1417.32 1328.74,1417.32 1505.91,1417.32 1683.07,1417.32 1860.24,1417.32 2037.4,1417.32 2214.57,1417.32 2391.73,1417.32 2568.9,1417.32 2746.06,1417.32 2923.23,1417.32 1062.99,1594.49 1240.16,1594.49 2303.15,1594.49 2480.32,1594.49 2657.48,1594.49 2834.65,1594.49 1328.74,1771.65 2391.73,1771.65 2568.9,1771.65 2746.06,1771.65 2923.23,1771.65 708.66,1948.82 2834.65,1948.82 2391.73,2125.98 2568.9,2125.98 2746.06,2125.98 2923.23,2125.98 2480.32,2303.15 2657.48,2303.15 2834.65,2303.15 974.41,2480.32 1683.07,2480.32 1860.24,2480.32 2037.4,2480.32 2214.57,2480.32 2746.06,2480.32 708.66,2657.48 885.83,2657.48 1240.16,2657.48 1594.49,2657.48 1771.65,2657.48 1948.82,2657.48 2125.98,2657.48 2303.15,2657.48 2480.32,2657.48 2657.48,2657.48 2834.65,2657.48 1151.58,2834.65 1328.74,2834.65 1505.91,2834.65 1683.07,2834.65 1860.24,2834.65 2037.4,2834.65 2214.57,2834.65 2391.73,2834.65 2746.06,2834.65 885.83,3011.81 1948.82,3011.81 2657.48,3011.81
  other v2: 1640.75,1882.87
MSEL0: R5.1 S1.1 U1.M17 | length 1287.1
  Top Layer w3.94: U1.M17 2003.15,1993.7 2003.15,2064.6 2056.66,2118.11 2093.08,2154.53 2245.08,2154.53 2280.51,2189.96 2280.51,2263.78
  Top Layer w7.87: 2280.51,2263.78 2280.51,2445.87
  Top Layer w11.81: 2280.51,2445.87 2280.51,2694.88 2337.6,2751.97 2434.84,2751.97 2482.48,2799.61 R5.1 2599.61,2799.61 S1.1
MSEL1: R6.1 S1.2 U1.L18 | length 1096.3
  Top Layer w3.94: U1.L18 2076.77,2040.55 2076.77,2059.48 2135.4,2118.11 2267.72,2118.11 2306.1,2156.5 2306.1,2254.92
  Top Layer w7.87: 2306.1,2254.92 2306.1,2427.17
  Top Layer w11.81: 2306.1,2427.17 2306.1,2597.44 2352.36,2643.7 2425,2643.7 2482.48,2701.18 R6.1 2484.06,2700 S1.2
MSEL2: R7.1 S1.3 U1.L17 | length 1096.2
  Top Layer w3.94: U1.L17 2036.22,2000 2094.52,2000 2115.16,2020.64 2115.16,2060.04 2133.86,2078.74 2282.48,2078.74 2330.71,2126.97 2330.71,2244.09
  Top Layer w7.87: 2330.71,2244.09 2330.71,2408.46
  Top Layer w11.81: 2330.71,2408.46 2330.71,2524.61 2351.38,2545.28 2428.94,2545.28 2482.48,2598.82 R7.1 2484.06,2600 S1.3
MSEL3: R8.1 S1.4 U1.K20 | length 851.8
  Top Layer w3.94: U1.K20 2153.35,2040.35 2300.2,2040.35 2357.28,2097.44 2357.28,2227.36
  Top Layer w7.87: 2357.28,2227.36 2357.28,2396.65
  Top Layer w11.81: 2357.28,2396.65 2357.28,2418.31 2390.75,2451.77 2433.86,2451.77 2482.48,2500.39 R8.1 2483.27,2500 S1.4
nCONF: C35.1 J66.1 R9.1 SW1.1 U1.K5 | length 2329.5
  Top Layer w3.94: U1.K5 1544.09,2056.82 1556.35,2044.56 v2(1556.35,2042.32)
  Top Layer w11.81: v2(2661.42,1979.33) 2711.22,1979.33 SW1.1@2711.42,1979.13 ; R9.1 J66.1 2711.42,1111.42 2711.42,1620.87 SW1.1@2711.42,1979.13 ; C35.1 2768.7,2079.72 2733.07,2044.09 2733.07,2000.79 SW1.1@2711.42,1979.13
  Layer 2 w11.81: v2(1556.35,2042.32) 1641.73,2042.32 1692.91,1991.14 1910.43,1991.14 1941.93,1959.65 2641.73,1959.65 v2(2661.42,1979.33)
NetC36_1: C36.1 Y1.3 | length 65.8
  Bottom Layer w9.84: Y1.3 1201.37,2166.74 C36.1
NetJ25_1: J25.1 U1.H3 | length 1020.9
  Top Layer w3.94: J25.1 1020,2500 1171.57,2348.43 1299.21,2348.43 1509.88,2348.43 1519.68,2338.62 1519.68,2173.2 1484.28,2137.8 U1.H3
NetJ26_1: J26.1 U1.G3 | length 793.2
  Top Layer w3.94: J26.1 960,1900 1252.91,2192.91 1449.61,2192.91 U1.G3
NetJ27_1: J27.1 U1.B2 | length 852.7
  Top Layer w3.94: J27.1 740,2640 1000,2640 1252.2,2387.8 1412.2,2387.8 U1.B2
NetJ28_1: J28.1 U1.B1 | length 680.2
  Top Layer w3.94: J28.1 1000,2600 1225.98,2374.02 U1.B1
NetJ29_1: J29.1 U1.H4 | length 1139.7
  Top Layer w3.94: J29.1 740,2540 1020,2540 1203.7,2356.3 1299.21,2356.3 1513.14,2356.3 1527.56,2341.87 1527.56,2160.63 U1.H4
NetJ30_1: J30.1 U1.E4 | length 846.6
  Top Layer w3.94: J30.1 740,2240 1020,2240 1058.54,2278.54 1482.09,2278.54 U1.E4
NetJ35_1: J35.1 U1.E3 | length 699.9
  Top Layer w3.94: J35.1 1020,2200 1089.68,2269.68 1451.58,2269.68 U1.E3
NetJ36_1: J36.1 U1.C2 | length 665.3
  Top Layer w3.94: J36.1 1040,2400 1120.12,2319.88 1411.22,2319.88 U1.C2
NetJ42_1: J42.1 U1.C1 | length 746.5
  Top Layer w3.94: J42.1 740,2440 1040,2440 1145.53,2334.47 U1.C1@1386.19,2334.47
NetJ43_1: J43.1 U1.D2 | length 761.1
  Top Layer w3.94: J43.1 740,2340 1060,2340 1089.96,2310.04 1411.22,2310.04 U1.D2
NetJ44_1: J44.1 U1.D1 | length 588.6
  Top Layer w3.94: J44.1 804.72,2295.28 U1.D1
NetJ45_1: J45.1 U1.H7 | length 1261.2
  Top Layer w3.94: J45.1 960,2800 1308.23,2451.77 1588.89,2451.77 1606.3,2434.36 1606.3,2154.33 U1.H7
NetJ46_1: J46.1 U1.H6 | length 1337.2
  Top Layer w3.94: J46.1 740,2740 980,2740 1276.1,2443.9 1576.59,2443.9 1598.43,2422.06 1598.43,2152.76 U1.H6
NetJ47_1: J47.1 U1.J6 | length 1481.6
  Top Layer w3.94: J47.1 740,2840 960,2840 1330.51,2469.49 1586.61,2469.49 1636.67,2419.43 1636.67,2132.7 1612.07,2108.1 1593.14,2108.1 U1.J6
NetJ48_1: J48.1 U1.G4 | length 939.1
  Top Layer w3.94: J48.1 740,1940 960,1940 1220.79,2200.79 1461.7,2200.79 1485.32,2177.17 U1.G4
NetJ49_1: J49.1 U1.G5 | length 1082.7
  Top Layer w3.94: J49.1 740,1740 840,1740 1259.45,2159.45 1424.21,2159.45 1459.25,2124.41 1511.78,2124.41 1544.09,2156.73 U1.G5
NetJ50_1: J50.1 U1.E2 | length 690.6
  Top Layer w3.94: J50.1 1000,2100 1142.52,2242.52 1412.6,2242.52 U1.E2
NetJ52_1: J52.1 U1.E1 | length 751.2
  Top Layer w3.94: J52.1 740,2140 1000,2140 1115.91,2255.91 U1.E1
NetJ53_1: J53.1 U1.F2 | length 827.1
  Top Layer w3.94: J53.1 740,2040 980,2040 1170.32,2230.32 1412.2,2230.32 U1.F2
NetJ54_1: J54.1 U1.F1 | length 676.3
  Top Layer w3.94: J54.1 980,2000 1196.54,2216.54 U1.F1
NetJ55_1: J55.1 U1.J5 | length 1159.2
  Top Layer w3.94: J55.1 840,1400 1220,1780 1220,1994.69 1302.47,2077.17 1522.83,2077.17 U1.J5
NetJ56_1: J56.1 U1.H5 | length 1137.5
  Top Layer w3.94: J56.1 980,2700 1281.38,2398.62 1538.42,2398.62 1557.48,2379.56 1557.48,2151.18 U1.H5
NetJ57_1: J57.1 U1.J7 | length 1375.5
  Top Layer w3.94: J57.1 960,2900 1382.64,2477.36 1589.88,2477.36 1644.54,2422.7 1644.54,2120.13 U1.J7
NetJ58_1: J58.1 U1.K7 | length 1596.2
  Top Layer w3.94: J58.1 740,2940 980,2940 1433.78,2486.22 1616.14,2486.22 ; 1614.17,2486.22 1676.87,2423.53 1676.87,2133.53 1622.83,2079.49 U1.K7
NetJ59_1: J59.1 U1.J4 | length 966.2
  Top Layer w3.94: J59.1 840,1600 1140,1900 1140,1961.85 1299.21,2121.06 1438.98,2121.06 1445.87,2114.17 1468.54,2114.17 1478.74,2103.97 1484.25,2098.43 U1.J4
NetJ60_1: J60.1 U1.H2 | length 818.7
  Top Layer w3.94: J60.1 840,1700 1291.57,2151.57 1412.2,2151.57 U1.H2
NetJ61_1: J61.1 U1.H1 | length 932
  Top Layer w3.94: J61.1 740,1640 840,1640 1120,1920 1120,1958.58 1299.21,2137.8 U1.H1
NetJ62_1: J62.1 U1.J3 | length 1089.5
  Top Layer w3.94: J62.1 740,1540 840,1540 1160,1860 1160,1970.71 1301.49,2112.2 1431.1,2112.2 1431.5,2111.81 ; 1431.53,2111.81 1439.37,2103.97 1444.88,2098.43 U1.J3
NetJ63_1: J63.1 U1.J2 | length 1124.1
  Top Layer w3.94: J63.1 740,1440 840,1440 1200,1800 1200,1985.83 1299.21,2085.04 1412.6,2085.04 U1.J2
NetJ64_1: J64.1 U1.J1 | length 916
  Top Layer w3.94: J64.1 840,1500 1180,1840 1180,1979.21 1299.21,2098.43 U1.J1
NetJ65_1: J65.1 U1.K1 | length 1153.2
  Top Layer w3.94: J65.1 740,1340 840,1340 1240,1740 1240,1999.84 1299.21,2059.06 U1.K1
nSTATUS: J66.3 R11.1 U1.K6 | length 1735.5
  Top Layer w3.94: U1.K6 1607.28,2035.24 1607.28,1531.7 1648.62,1490.36
  Top Layer w7.87: 1648.62,1490.36 1703.95,1435.04
  Top Layer w11.81: 1703.95,1435.04 1784.65,1354.33 2291.34,1354.33 2500,1145.67 J66.3 R11.1
TCK: J51.1 R2.2 U1.L2 | length 1302.8
  Top Layer w3.94: U1.L2 1425.98,2017.82 1437.99,2005.81 v2(1437.99,2003.94)
  Top Layer w11.81: R2.2 J51.1
  Layer 2 w11.81: J51.1 1142.13,1100 1110.24,1131.89 1110.24,1255.91 1304.13,1449.8 1304.13,1952.76 1382.87,2031.5 1410.43,2031.5 v2(1437.99,2003.94)
TDI: J51.9 R4.1 U1.L5 | length 1101.9
  Top Layer w3.94: U1.L5 1544.09,2016.83 1556.1,2004.82 v2(1556.1,2001.97)
  Top Layer w11.81: J51.9 R4.1
  Layer 2 w11.81: v2(1556.1,2001.97) 1616.14,1941.93 1616.14,1342.52 1671.26,1287.4 1671.26,1171.26 J51.9
TDO: J51.3 U1.L4 | length 1298
  Top Layer w3.94: U1.L4 1504.72,2018.8 1517.72,2005.81 v2(1517.72,2004.92)
  Layer 2 w11.81: J51.3 1306.63,1093.37 1306.63,1063.44 1351.38,1018.7 1504.92,1018.7 1554.13,1067.91 1554.13,1914.37 1517.72,1950.79 v2(1517.72,2004.92)
TMS: J51.5 R3.1 U1.L1 | length 1066.5
  Top Layer w3.94: U1.L1 1386.61,2016.83 1399.61,2003.84 v2(1399.61,2000.98)
  Top Layer w11.81: R3.1 J51.5
  Layer 2 w11.81: v2(1399.61,2000.98) 1446.85,1953.74 1446.85,1142.72 1404.13,1100 J51.5
"VCC 3.3": C1.2 C2.2 C3.2 C4.2 C34.2 J1.1 J2.1 J3.1 J4.1 J33.1 J34.1 J51.4 J66.5 R1.2 R3.2 R4.2 R5.2 R6.2 R7.2 R8.2 R9.2 R10.2 R11.2 U1.D4 U1.F4 U1.K4 Y1.4 | length 1106.2
  Top Layer w3.94: v2(1492.13,2231.3) 1492.13,2230.22 1504.72,2217.62 U1.F4 ; v2(1495.67,2310.04) 1495.67,2307.19 1504.72,2298.13 U1.D4 ; U1.K4 1504.82,2059.06 1519.59,2044.29 v2(1519.68,2044.29)
  Top Layer w19.68: R3.2@1400.2,941.93 v3(1437.01,941.93) ; C4.2 1600,3014.57 1614.57,3000 J1.1 ; R4.2@1758.07,1099.8 v3(1794.88,1099.8) ; v3(2387.99,2500.59) R8.2@2424.8,2500.59 ; v3(2387.99,2599.02) R7.2@2424.8,2599.02 ; v3(2387.99,2701.38) R6.2@2424.8,2701.38 ; v3(2387.99,2799.8) R5.2@2424.8,2799.8 ; R11.2@2500.2,941.93 v3(2537.01,941.93) 2699.8,941.93 R9.2
  Bottom Layer w7.87: C2.2 v2(1492.13,2231.3) ; C1.2 1478.35,2092.52 1517.8,2053.06 1517.8,2046.17 v2(1519.68,2044.29) ; C3.2 1495.67,2344.88 v2(1495.67,2310.04)
  Bottom Layer w19.68: v2(964.57,2119.09) 974.41,2109.25 1006.89,2109.25 1016.73,2099.41 C34.2 1017.15,2097.86 1017.15,2166.32 Y1.4 ; R1.2 1464.57,2278.94 v2(1495.67,2310.04)
VCCA: C29.2 C30.2 C31.2 C32.2 C33.2 J19.1 J20.1 U1.F18 U1.G6 U1.T6 U1.U18 | length 3235.4
  Top Layer w3.94: v2(1574.41,2191.93) 1574.41,2189.07 1583.46,2180.02 U1.G6 ; U1.T6 1583.46,1819.98 1592.52,1810.93 v2(1592.52,1808.07) ; v2(2046.85,1798.23) 2046.85,1795.37 2055.91,1786.32 U1.U18 ; v2(2046.85,2231.3) 2046.85,2228.45 2055.91,2219.39 U1.F18
  Top Layer w19.68: C33.2 1300,3014.57 1314.57,3000 J19.1
  Layer 1 w19.68: J20.1 J19.1 1400,2650 1314.96,2564.96 1314.96,2024.61 1531.5,1808.07 v2(1592.52,1808.07) 1602.36,1798.23 v2(2046.85,1798.23) 2064.96,1816.34 2064.96,2213.19 v2(2046.85,2231.3) 1613.78,2231.3 v2(1574.41,2191.93)
  Bottom Layer w7.87: C30.2 1558.07,1808.07 v2(1592.52,1808.07) ; v2(1574.41,2191.93) 1601.38,2191.93 1619.09,2209.65 1621.06,2209.65 1636.81,2225.39 C29.2 ; v2(2046.85,1798.23) 2078.74,1798.23 C32.2 ; v2(2046.85,2231.3) C31.2
VCCD: C24.2 C25.2 C26.2 C27.2 C28.2 J17.1 J18.1 U1.E17 U1.F6 U1.U6 U1.V17 | length 3437.3
  Top Layer w3.94: v2(1574.41,2231.3) 1574.41,2228.45 1583.46,2219.39 U1.F6 ; U1.U6 1583.46,1780.61 1592.52,1771.56 v2(1592.52,1768.7) ; v2(2007.48,1758.86) 2007.48,1756 2016.54,1746.95 U1.V17 ; v2(2007.48,2270.67) 2007.48,2267.82 2016.54,2258.76 U1.E17
  Top Layer w19.68: C28.2 1000,3014.57 1014.57,3000 J17.1
  Layer 1 w19.68: J17.1 J18.1 1200,2038.19 1469.49,1768.7 v2(1592.52,1768.7) 1602.36,1758.86 v2(2007.48,1758.86) 2056.1,1758.86 2104.33,1807.09 2104.33,2225.39 2059.06,2270.67 v2(2007.48,2270.67) 1613.78,2270.67 v2(1574.41,2231.3)
  Bottom Layer w7.87: C26.2 1571.85,1768.7 v2(1592.52,1768.7) ; v2(1574.41,2231.3) 1574.41,2271.26 C25.2 ; v2(2007.48,1758.86) 2010.14,1758.86 2013.1,1755.91 2032.48,1755.91 C27.2 ; v2(2007.48,2270.67) 2027.56,2270.67 C24.2
VCCINT: C5.2 C6.2 C7.2 C8.2 C9.2 C10.2 C11.2 C12.2 C13.2 C14.2 C15.2 C16.2 C17.2 C18.2 C19.2 C20.2 C21.2 C22.2 C23.2 J5.1 J6.1 J7.1 J8.1 U1.G12 U1.H9 U1.H11 U1.H15 U1.J8 U1.J10 U1.J11 U1.J12 U1.J13 U1.J14 U1.J16 U1.K8 U1.K9 U1.K14 U1.K15 U1.L7 U1.L9 U1.L14 U1.L16 U1.M8 U1.M9 U1.M14 U1.M15 U1.N9 U1.N14 U1.P9 U1.P10 U1.P11 U1.P12 U1.P13 U1.P14 U1.P15 U1.R8 U1.R10 U1.R12 U1.T7 U1.T9 U1.T13 | length 4620.4
  Top Layer w5.91: U1.T7 v2(1642.52,1842.52) U1.R8 U1.P9 ; U1.L7 U1.M8 U1.M9 ; U1.J8 v2(1662.2,2078.74) U1.K8 U1.K9 v2(1701.57,2039.37) U1.L9 U1.M9 ; U1.T9 v2(1721.26,1842.52) U1.R10 U1.P10 ; U1.H9 v2(1721.26,2118.11) U1.J10 U1.J11 ; U1.G12 v2(1800,2157.48) U1.H11 U1.J11 ; U1.T13 v2(1839.37,1842.52) U1.R12 U1.P12 ; U1.P15 v2(1918.11,1901.57) U1.P14 ; U1.H15 v2(1918.11,2118.11) U1.J14 ; U1.L16 v2(1957.48,2000) U1.M15 U1.M14 ; U1.J16 v2(1957.48,2078.74) U1.K15 U1.K14 ; U1.P9 U1.N9 v2(1701.57,1960.63) U1.M9 ; U1.P9 v2(1721.26,1901.57) U1.P10 ; U1.P10 U1.P11 v2(1800,1901.57) U1.P12 ; U1.J11 U1.J12 v2(1839.37,2098.43) U1.J13 U1.J14 ; U1.P12 U1.P13 U1.P14 ; U1.P14 U1.N14 v2(1898.43,1960.63) U1.M14 ; U1.M14 U1.L14 v2(1898.43,2039.37) U1.K14 ; U1.K14 U1.J14
  Top Layer w19.68: C5.2 2100,3014.57 2114.57,3000 J5.1
  Layer 1 w19.68: v2(1662.2,2078.74) 1652.46,2069 1612.11,2069 1570.87,2110.24 1570.87,2135.83 1519.69,2187.01 1519.69,2261.81 2198.35,2940.47 2198.35,2998.35 J5.1 J8.1
  Bottom Layer w5.91: v2(1721.26,1901.57) 1723.52,1903.83 1723.52,1915.45 1730.31,1922.24 1730.31,1924.21 1747.05,1940.94 C11.2
  Bottom Layer w7.87: C13.2 1608.27,1965.55 1642.52,1999.8 v2(1642.52,2000) ; C14.2 1656.3,1915.35 v2(1701.57,1960.63) ; C10.2 1617.13,2128.94 1660.32,2085.74 1660.32,2080.62 v2(1662.2,2078.74) ; v2(1642.52,1842.52) 1642.52,1839.86 1644.68,1837.69 1644.68,1814.96 C15.2 ; v2(1701.57,2039.37) 1761.81,2039.37 C12.2 ; C9.2 1721.26,2168.5 v2(1721.26,2118.11) ; v2(1721.26,1842.52) 1723.14,1840.64 1731.21,1840.64 1760.83,1811.02 C19.2 ; C8.2 1800,2189.17 v2(1800,2157.48) ; v2(1800,1901.57) 1844.49,1901.57 1890.75,1855.32 1892.72,1855.32 1908.46,1839.57 C18.2 ; v2(1839.37,1842.52) 1839.37,1803.35 C17.2 ; v2(1839.37,2098.43) 1839.37,2147.44 C7.2 ; v2(1898.43,1960.63) 1901.09,1960.63 1909.95,1951.77 1974.41,1951.77 C20.2 ; v2(1898.43,2039.37) 2001.97,2039.37 C22.2 ; v2(1918.11,1901.57) 1935.83,1883.86 1956.69,1883.86 C16.2 ; v2(1918.11,2118.11) 1918.11,2165.16 C6.2 ; v2(1957.48,2000) 2017.72,2000 C21.2 ; v2(1957.48,2078.74) 1974.21,2095.47 1996.06,2095.47 C23.2
pads on no net: J51.6 J51.7 J51.8 U1. U1.A2 U1.A3 U1.A4 U1.A5 U1.A6 U1.A7 U1.A8 U1.A9 U1.A10 U1.A11 U1.A12 U1.A13 U1.A14 U1.A15 U1.A16 U1.A17 U1.A18 U1.A19 U1.A20 U1.A21 U1.AA1 U1.AA3 U1.AA4 U1.AA5 U1.AA6 U1.AA7 U1.AA8 U1.AA9 U1.AA10 U1.AA11 U1.AA12 U1.AA13 U1.AA14 U1.AA15 U1.AA16 U1.AA17 U1.AA18 U1.AA19 U1.AA20 U1.AA21 U1.AB2 U1.AB3 U1.AB4 U1.AB5 U1.AB6 U1.AB7 U1.AB8 U1.AB9 U1.AB10 U1.AB11 U1.AB12 U1.AB13 U1.AB14 U1.AB15 U1.AB16 U1.AB17 U1.AB18 U1.AB19 U1.AB20 U1.AB21 U1.B3 U1.B4 U1.B5 U1.B6 U1.B7 U1.B8 U1.B9 U1.B10 U1.B11 U1.B12 U1.B13 U1.B14 U1.B15 U1.B16 U1.B17 U1.B18 U1.B19 U1.B20 U1.B21 U1.B22 U1.C3 U1.C4 U1.C6 U1.C7 U1.C8 U1.C10 U1.C13 U1.C15 U1.C17 U1.C18 U1.C19 U1.C20 U1.C21 U1.C22 U1.D5 U1.D6 U1.D7 U1.D8 U1.D9 U1.D10 U1.D11 U1.D12 U1.D13 U1.D14 U1.D15 U1.D16 U1.D17 U1.D18 U1.D19 U1.D20 U1.D21 U1.D22 U1.E5 U1.E6 U1.E7 U1.E8 U1.E9 U1.E10 U1.E11 U1.E12 U1.E13 U1.E14 U1.E15 U1.E16 U1.E19 U1.E21 U1.E22 U1.F7 U1.F8 U1.F9 U1.F10 U1.F11 U1.F13 U1.F14 U1.F15 U1.F16 U1.F17 U1.F19 U1.F20 U1.F21 U1.F22 U1.G7 U1.G8 U1.G9 U1.G10 U1.G11 U1.G13 U1.G14 U1.G15 U1.G16 U1.G17 U1.G18 U1.G19 U1.G21 U1.G22 U1.H16 U1.H17 U1.H18 U1.H19 U1.H20 U1.H21 U1.H22 U1.J17 U1.J18 U1.J19 U1.J20 U1.J21 U1.J22 U1.K17 U1.K18 U1.K19 U1.K21 U1.K22 U1.L6 U1.L19 U1.L21 U1.L22 U1.M1 U1.M2 U1.M3 U1.M4 U1.M5 U1.M6 U1.M16 U1.M19 U1.M20 U1.M21 U1.M22 U1.N1 U1.N2 U1.N4 U1.N5 U1.N6 U1.N7 U1.N16 U1.N17 U1.N18 U1.N19 U1.N20 U1.N21 U1.N22 U1.P1 U1.P2 U1.P3 U1.P4 U1.P5 U1.P6 U1.P7 U1.P17 U1.P18 U1.P20 U1.P21 U1.P22 U1.R1 U1.R2 U1.R3 U1.R4 U1.R5 U1.R6 U1.R14 U1.R15 U1.R16 U1.R17 U1.R18 U1.R19 U1.R20 U1.R21 U1.R22 U1.T1 U1.T2 U1.T3 U1.T4 U1.T5 U1.T10 U1.T11 U1.T14 U1.T15 U1.T16 U1.T17 U1.T18 U1.T19 U1.T20 U1.T21 U1.T22 U1.U1 U1.U2 U1.U4 U1.U7 U1.U8 U1.U9 U1.U10 U1.U11 U1.U12 U1.U13 U1.U14 U1.U15 U1.U16 U1.U17 U1.U19 U1.U20 U1.U21 U1.U22 U1.V1 U1.V2 U1.V3 U1.V4 U1.V5 U1.V6 U1.V7 U1.V8 U1.V9 U1.V10 U1.V11 U1.V12 U1.V13 U1.V14 U1.V15 U1.V16 U1.V19 U1.V21 U1.V22 U1.W1 U1.W2 U1.W4 U1.W5 U1.W6 U1.W7 U1.W8 U1.W9 U1.W10 U1.W11 U1.W12 U1.W13 U1.W14 U1.W15 U1.W16 U1.W17 U1.W18 U1.W19 U1.W20 U1.W21 U1.W22 U1.Y1 U1.Y2 U1.Y3 U1.Y4 U1.Y6 U1.Y7 U1.Y8 U1.Y10 U1.Y13 U1.Y14 U1.Y15 U1.Y17 U1.Y19 U1.Y21 U1.Y22

## Polygon pours and split planes (outlines as drawn)
"VCC 3.3" on Layer 1 "VCC_3.3_L02_P009" (solid, pour order 9): 550.03,899.97 548.84,3098.84 cw(c701.16,3098.84) 701.16,3251.16 2900.03,3249.97 cw(c2900.03,3098.84) 3051.16,3098.84 3049.97,899.97 cw(c2898.84,899.97) 2898.84,748.84 699.97,750.03 cw(c699.97,899.97)
VCCINT on Layer 1 "VCCINT_L02_P006" (solid, pour order 6): 1630.91,1836.61 1630.91,1853.35 1674.21,1896.65 1674.21,1952.75 1630.91,1996.06 1630.91,2010.83 1650.59,2030.51 1650.59,2085.63 1693.9,2128.94 1753.94,2128.94 1792.32,2167.32 1808.07,2167.32 1812.01,2163.39 1812.01,2157.48 1859.25,2110.24 1894.68,2110.24 1913.39,2128.94 1924.21,2128.94 1968.5,2084.65 1968.5,2072.83 1968.5,1995.08 1932.09,1958.66 1926.18,1958.66 1911.42,1943.9 1911.42,1929.13 1927.17,1913.39 1932.09,1908.46 1932.09,1896.65 1922.24,1886.81 1892.72,1886.81 1854.33,1848.43 1854.33,1835.63 1848.43,1829.72 1827.76,1829.72 1797.24,1860.24 1755.91,1860.24 1726.38,1830.71 1636.81,1830.71
GND on Top Layer "GND_L01_P007" (solid, pour order 7): 548.84,901.16 550.03,3100.03 cw(c699.97,3100.03) 699.97,3249.97 2898.84,3251.16 cw(c2898.84,3098.84) 3051.16,3098.84 3049.97,899.97 cw(c2898.84,899.97) 2898.84,748.84 699.97,750.03 cw(c699.97,901.16)
GND on Bottom Layer "GND_L04_P008" (solid, pour order 8): 550.03,899.97 548.84,3098.84 cw(c701.16,3098.84) 701.16,3251.16 2900.03,3249.97 cw(c2900.03,3100.03) 3049.97,3100.03 3051.16,901.16 cw(c2900.03,901.16) 2900.03,750.03 701.16,748.84 cw(c701.16,899.97)
GND on Layer 2 "GND_L03_P010" (solid, pour order 10): 548.84,901.16 550.03,3100.03 cw(c699.97,3100.03) 699.97,3249.97 2898.84,3251.16 cw(c2898.84,3100.03) 3049.97,3100.03 3051.16,901.16 cw(c2900.03,901.16) 2900.03,750.03 701.16,748.84 cw(c701.16,901.16)

## Keep-outs
Keep-Out Layer:
  circle w78.74: c700,900 r100
  circle w78.74: c2900,900 r100
  circle w78.74: c2900,3100 r100
  circle w78.74: c700,3100 r100
  lines w11.81: 550,900 ccw(c700,900) 700,750 2900,750 ccw(c2900,900) 3050,900 3050,3100 ccw(c2900,3100) 2900,3250 700,3250 ccw(c700,3100) 550,3100 550,900

## Silkscreen, mask and mechanical layers (free items; w line width, h text height)
Top Overlay:
  drawing of 58 lines, arcs and shapes, not listed
  text "GND" at 1108.02,3159.26 h31.5
  text "GND" at 1408.02,3159.26 h31.5
  text "GND" at 1808.02,3159.26 h31.5
  text "GND" at 2308.02,3159.26 h31.5
  text "VCCD" at 1092.28,2909.26 h31.5
  text "VCCA" at 1392.28,2909.26 h31.5
  text "VCC 3.3" at 1747.67,2909.26 h31.5
  text "VCCINT" at 2263.41,2909.26 h31.5
  text "11p" at 857.87,2889.5 h31.5
  text "11n" at 568.66,2884.26 h31.5
  text "6n" at 589.65,2784.26 h31.5
  text "IO" at 857.87,2784.26 h31.5
  text "6p" at 589.65,2689.5 h31.5
  text "VREF" at 857.87,2684.26 h31.5
  text "2p" at 589.65,2589.5 h31.5
  text "2n" at 857.87,2584.26 h31.5
  text "7p" at 589.65,2489.5 h31.5
  text "7n" at 857.87,2484.26 h31.5
  text "4p" at 857.87,2389.5 h31.5
  text "4n" at 589.65,2384.26 h31.5
  text "5p" at 589.65,2289.5 h31.5
  text "5n" at 857.87,2284.26 h31.5
  text "3p" at 589.65,2189.5 h31.5
  text "3n" at 857.87,2184.26 h31.5
  text "8p" at 857.87,2089.5 h31.5
  text "8n" at 589.65,2084.26 h31.5
  text "9p" at 589.65,1989.5 h31.5
  text "9n" at 857.87,1984.26 h31.5
  text "1p" at 594.9,1889.5 h31.5
  text "1n" at 857.87,1884.26 h31.5
  text "GND" at 558.16,1784.26 h31.5
  text "GND" at 857.87,1784.26 h31.5
  text "13p" at 857.87,1689.5 h31.5
  text "VRF" at 558.16,1684.26 h31.5
  text "12p" at 857.87,1589.5 h31.5
  text "13n" at 563.41,1584.26 h31.5
  text "14n" at 563.41,1484.26 h31.5
  text "15n" at 857.87,1484.26 h31.5
  text "EP4CE55F23C8N" at 1422.4,1452.91 h60
  text "15p" at 563.41,1389.5 h31.5
  text "IO" at 857.87,1384.26 h31.5
  text "CONF_D" at 2586.88,1364.21 h31.5 r270
  text "nSTAT" at 2484.26,1332.72 h31.5 r270
  text "nCONF" at 2684.26,1332.72 h31.5 r270
  text "DCLK" at 2384.26,1301.24 h31.5 r270
  text "DTA" at 558.16,1284.26 h31.5
  text "GND" at 857.87,1284.26 h31.5
  text "GND" at 2184.26,1269.75 h31.5 r270
  text "3.3" at 2284.26,1264.5 h31.5 r270
  text "GND" at 558.16,1184.26 h31.5
  text "GND" at 857.87,1184.26 h31.5
  text "3.3" at 563.41,1084.26 h31.5
  text "3.3" at 857.87,1084.26 h31.5
Bottom Overlay:
  text "K7" at 641.84,2884.26 h31.5
  text "J7" at 910.35,2884.26 h31.5
  text "J6" at 641.84,2784.26 h31.5
  text "H7" at 910.35,2784.26 h31.5
  text "H6" at 641.84,2684.26 h31.5
  text "H5" at 910.35,2684.26 h31.5
  text "B2" at 641.84,2584.26 h31.5
  text "B1" at 899.86,2584.26 h31.5
  text "H4" at 641.84,2484.26 h31.5
  text "H3" at 910.35,2484.26 h31.5
  text "C1" at 641.84,2384.26 h31.5
  text "C2" at 910.35,2384.26 h31.5
  text "D2" at 641.84,2284.26 h31.5
  text "D1" at 899.86,2284.26 h31.5
  text "E4" at 641.84,2184.26 h31.5
  text "E3" at 910.35,2184.26 h31.5
  text "E1" at 641.84,2084.26 h31.5
  text "E2" at 910.35,2084.26 h31.5
  text "F2" at 641.84,1984.26 h31.5
  text "F1" at 899.86,1984.26 h31.5
  text "G4" at 641.84,1884.26 h31.5
  text "G3" at 910.35,1884.26 h31.5
  text "GND" at 641.84,1784.26 h31.5
  text "GND" at 941.84,1784.26 h31.5
  text "G5" at 641.84,1684.26 h31.5
  text "H2" at 910.35,1684.26 h31.5
  text "H1" at 641.84,1584.26 h31.5
  text "J4" at 910.35,1584.26 h31.5
  text "J3" at 641.84,1484.26 h31.5
  text "J1" at 899.86,1484.26 h31.5
  text "J2" at 641.84,1384.26 h31.5
  text "J5" at 910.35,1384.26 h31.5
  text "K1" at 641.84,1284.26 h31.5
  text "GND" at 941.84,1284.26 h31.5
  text "GND" at 641.84,1184.26 h31.5
  text "GND" at 941.84,1184.26 h31.5
  text "3.3" at 641.84,1084.26 h31.5
  text "3.3" at 936.59,1084.26 h31.5